# Altium PCB Buck Converter Rev1.PcbDoc (part 1 of 2)
Units mil, origin at the board's own origin, x right, y up, seen from the top; angles counter-clockwise.
Board outline 6000 x 4000 mil, 10 copper layers (Top Layer, Int1 (GND), Int2 (PWR), Int3 (Sign), Int4 (GND, Int5 (GND), Int6 (Sign), Int7 (PWR), Int8 (GND), Bottom Layer), stack 61.78 mil thick; 38 components, 749 nets, 114 pads, 81 vias.
Unrouted connection lines stored in the file: 9.
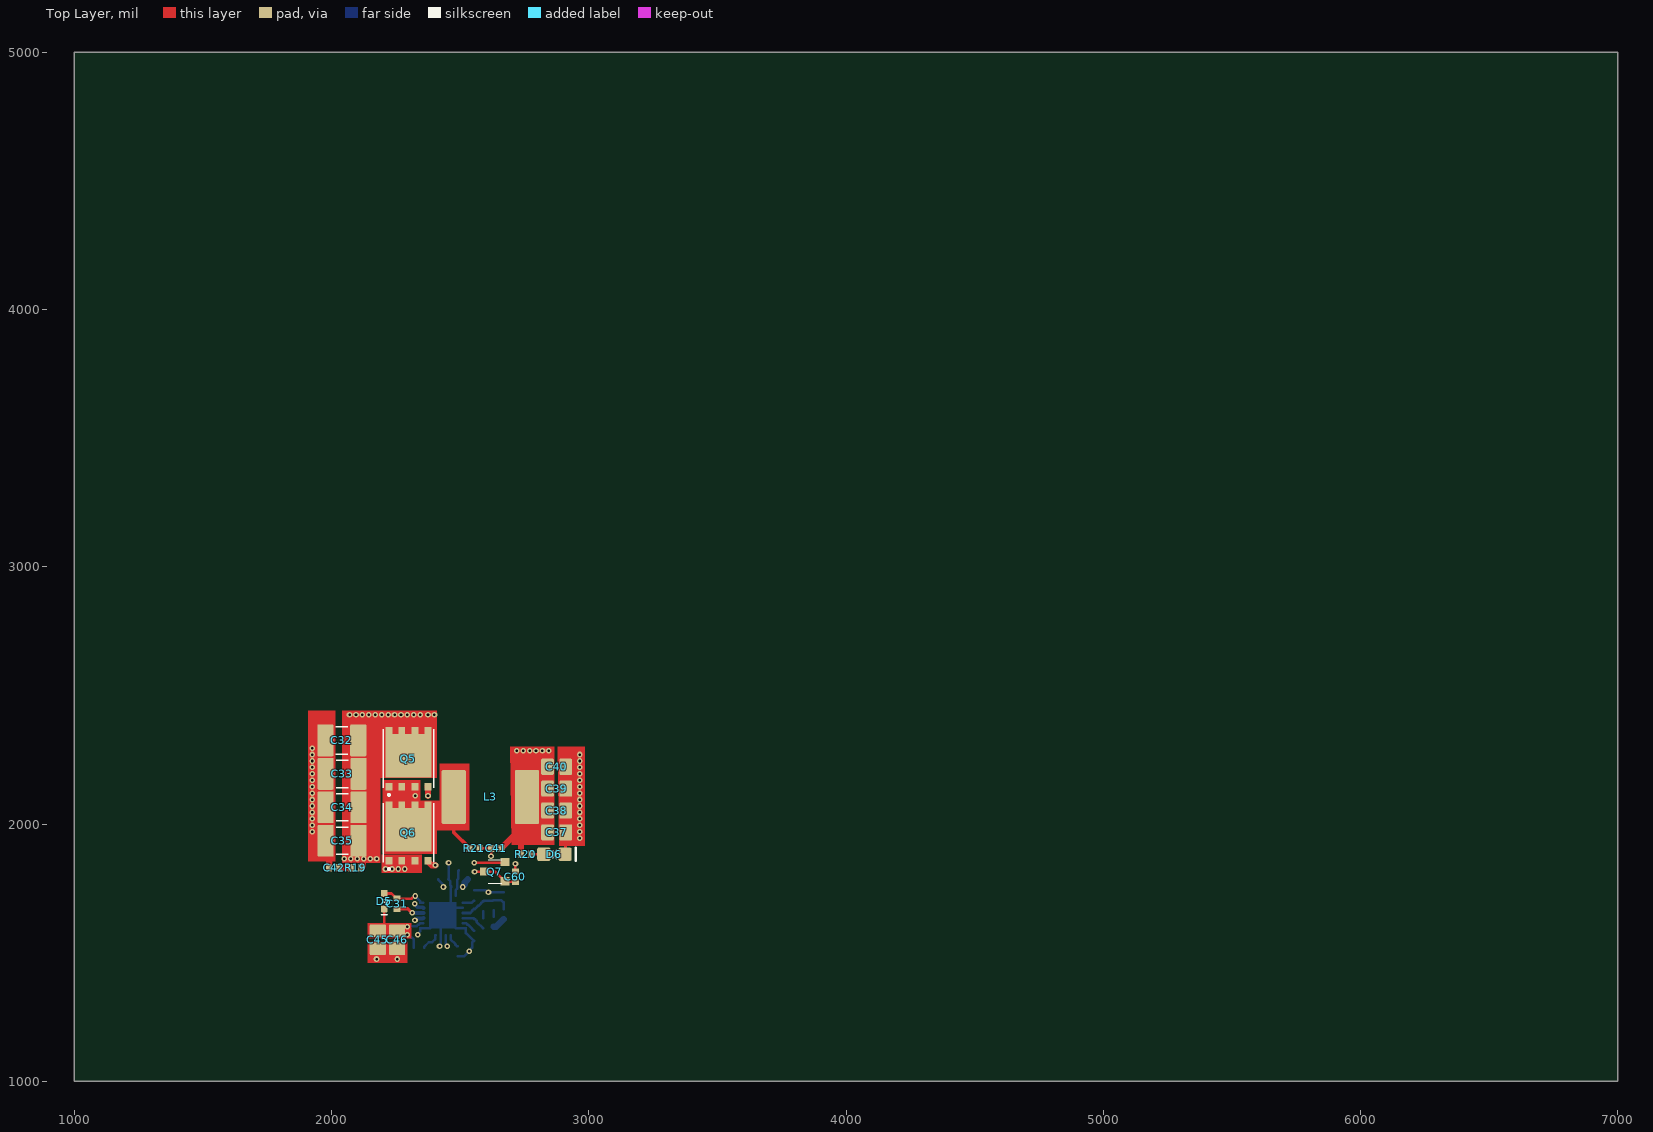
[diagram p0: Top Layer view]
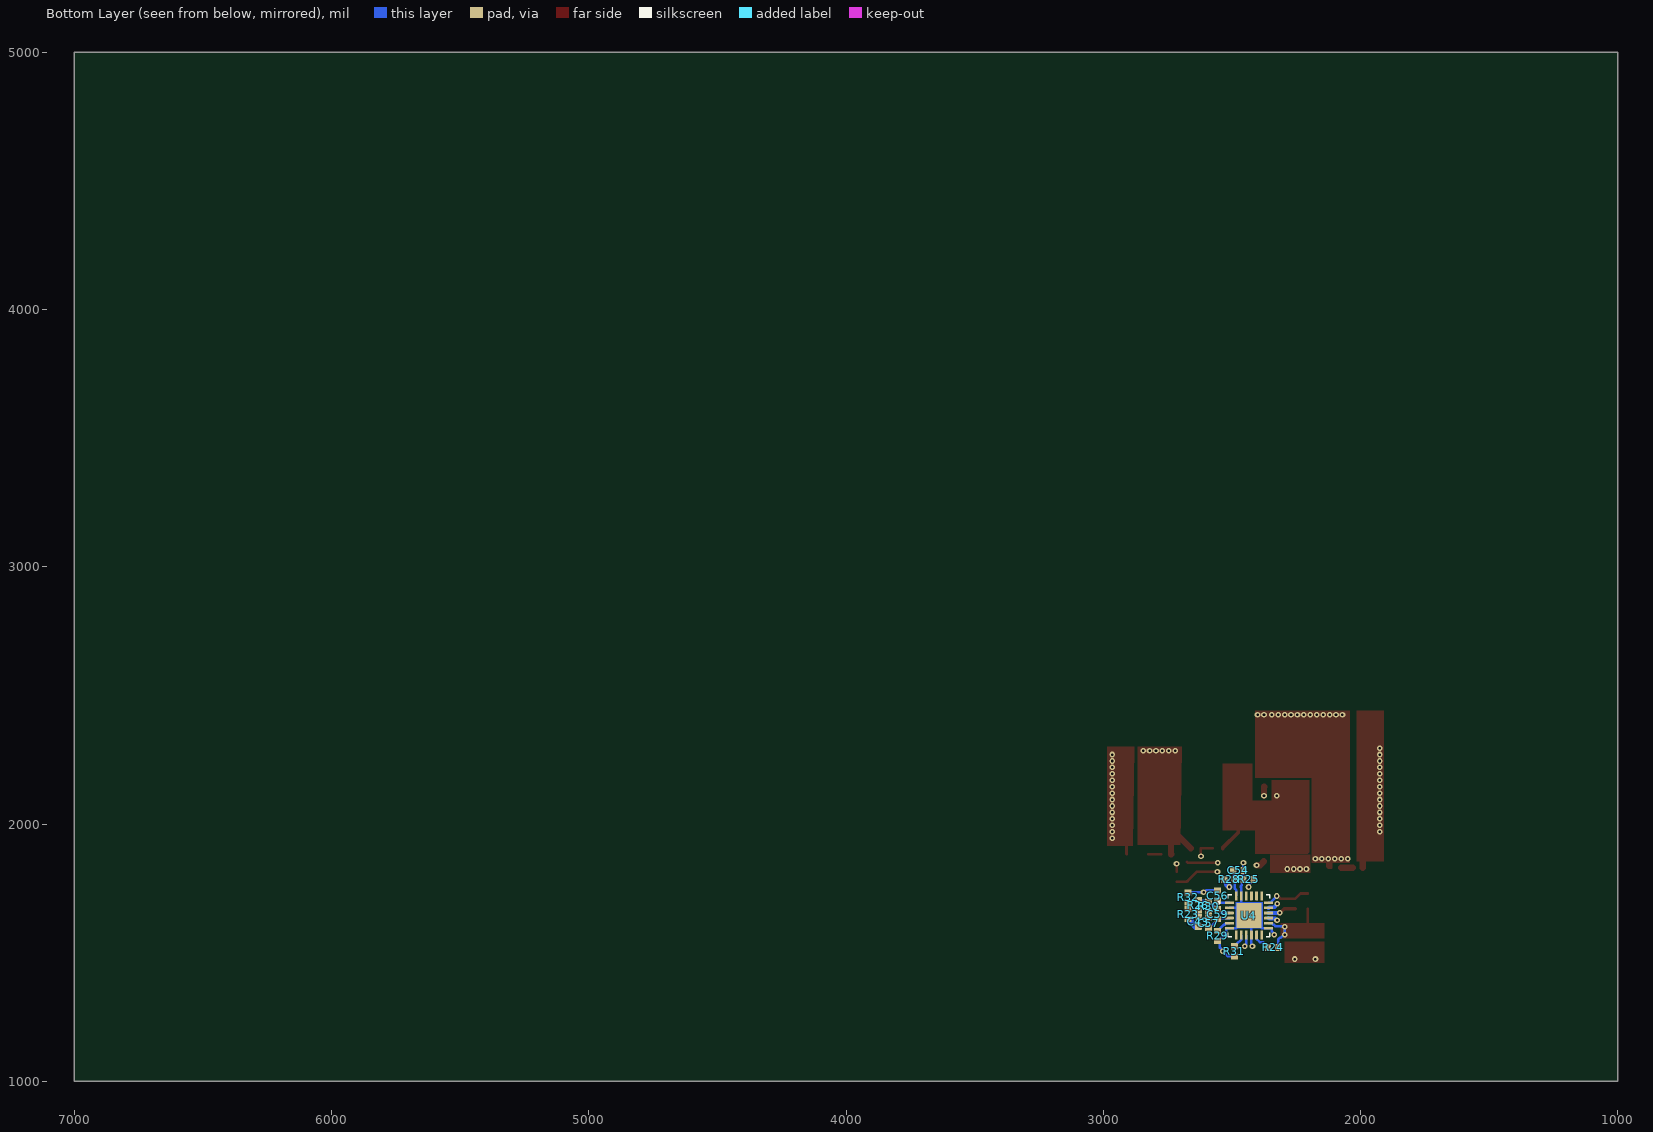
[diagram p1: Bottom Layer view, seen from below]
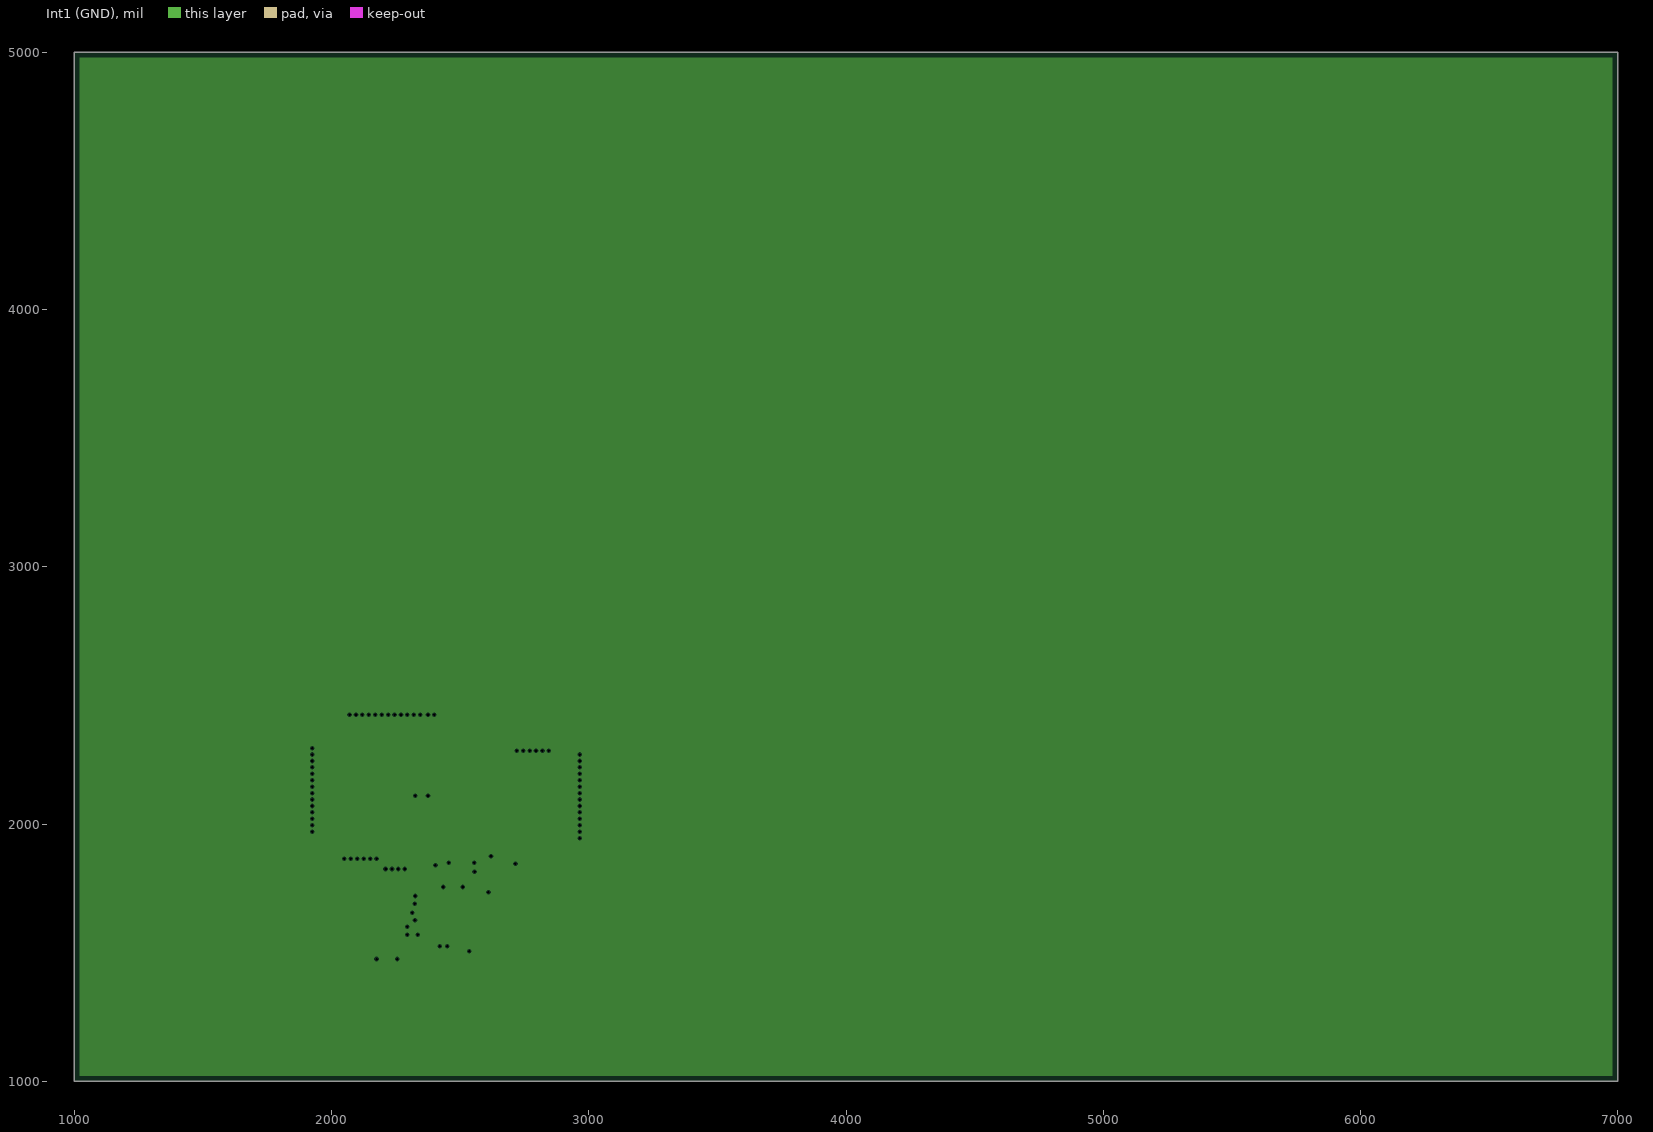
[diagram p2: Int1 (GND), clearances drawn from the general rule]
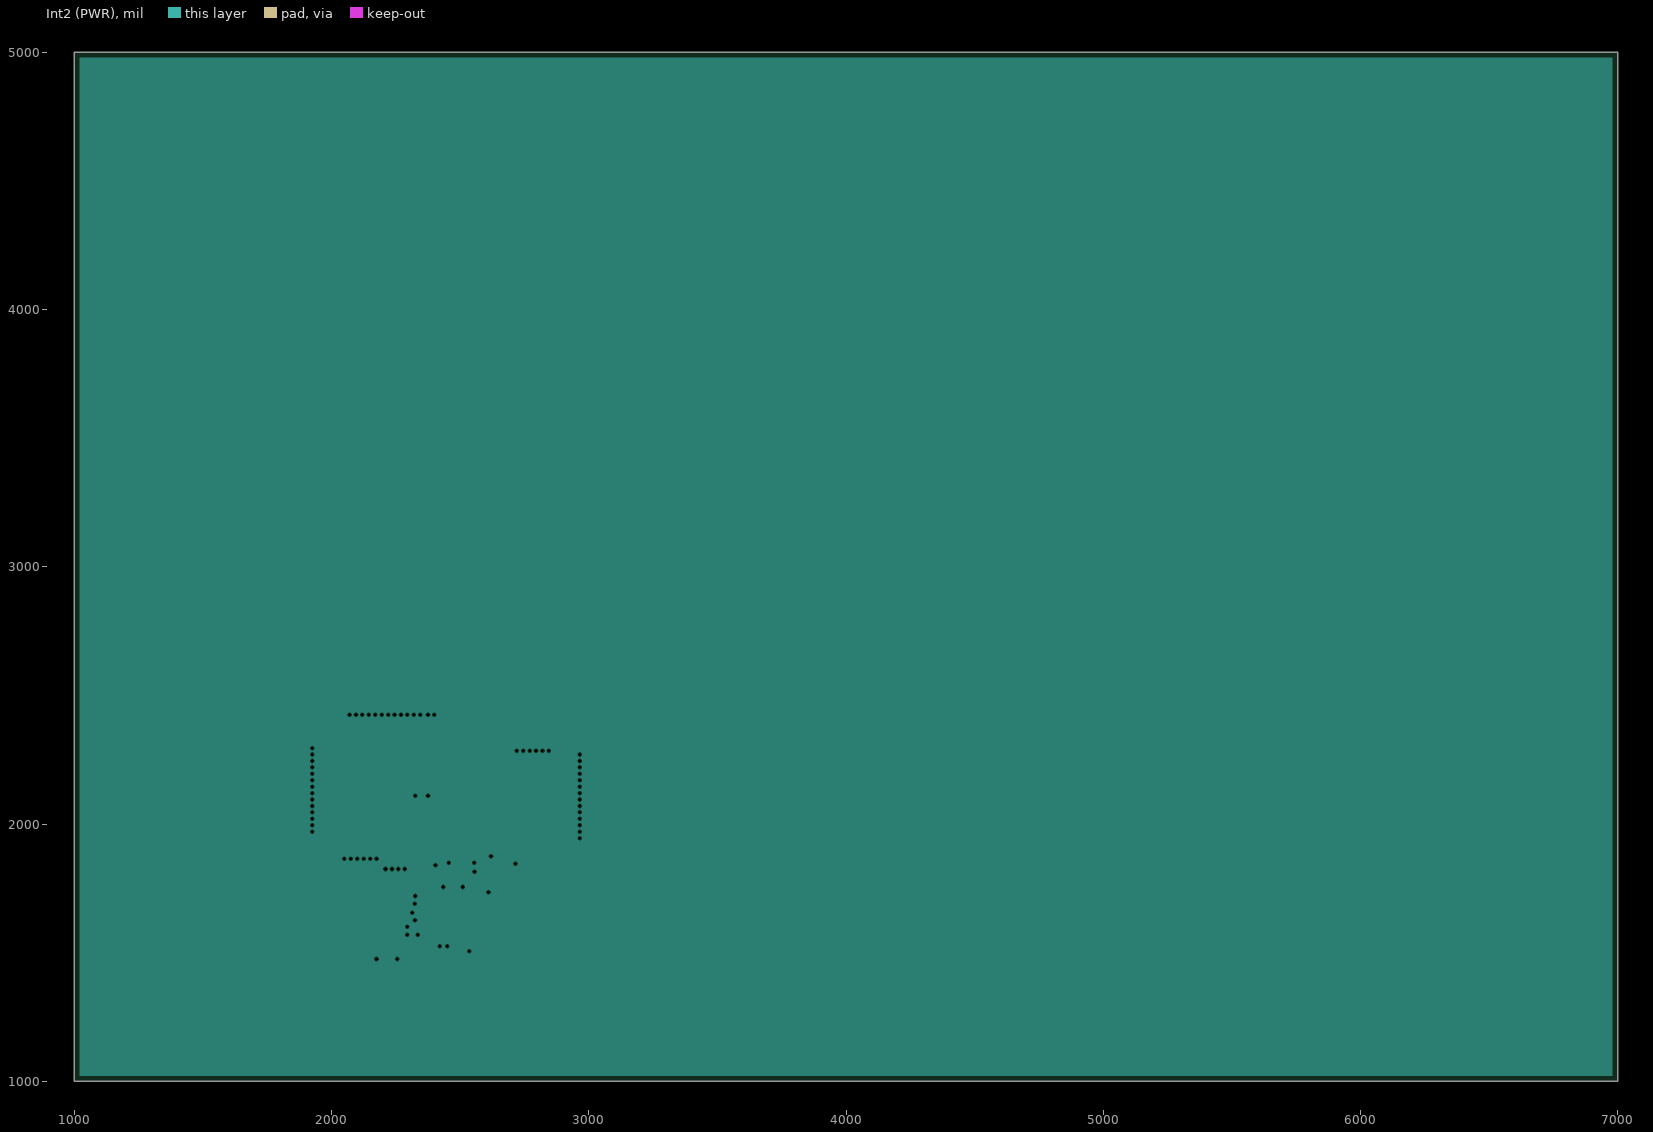
[diagram p3: Int2 (PWR), clearances drawn from the general rule]
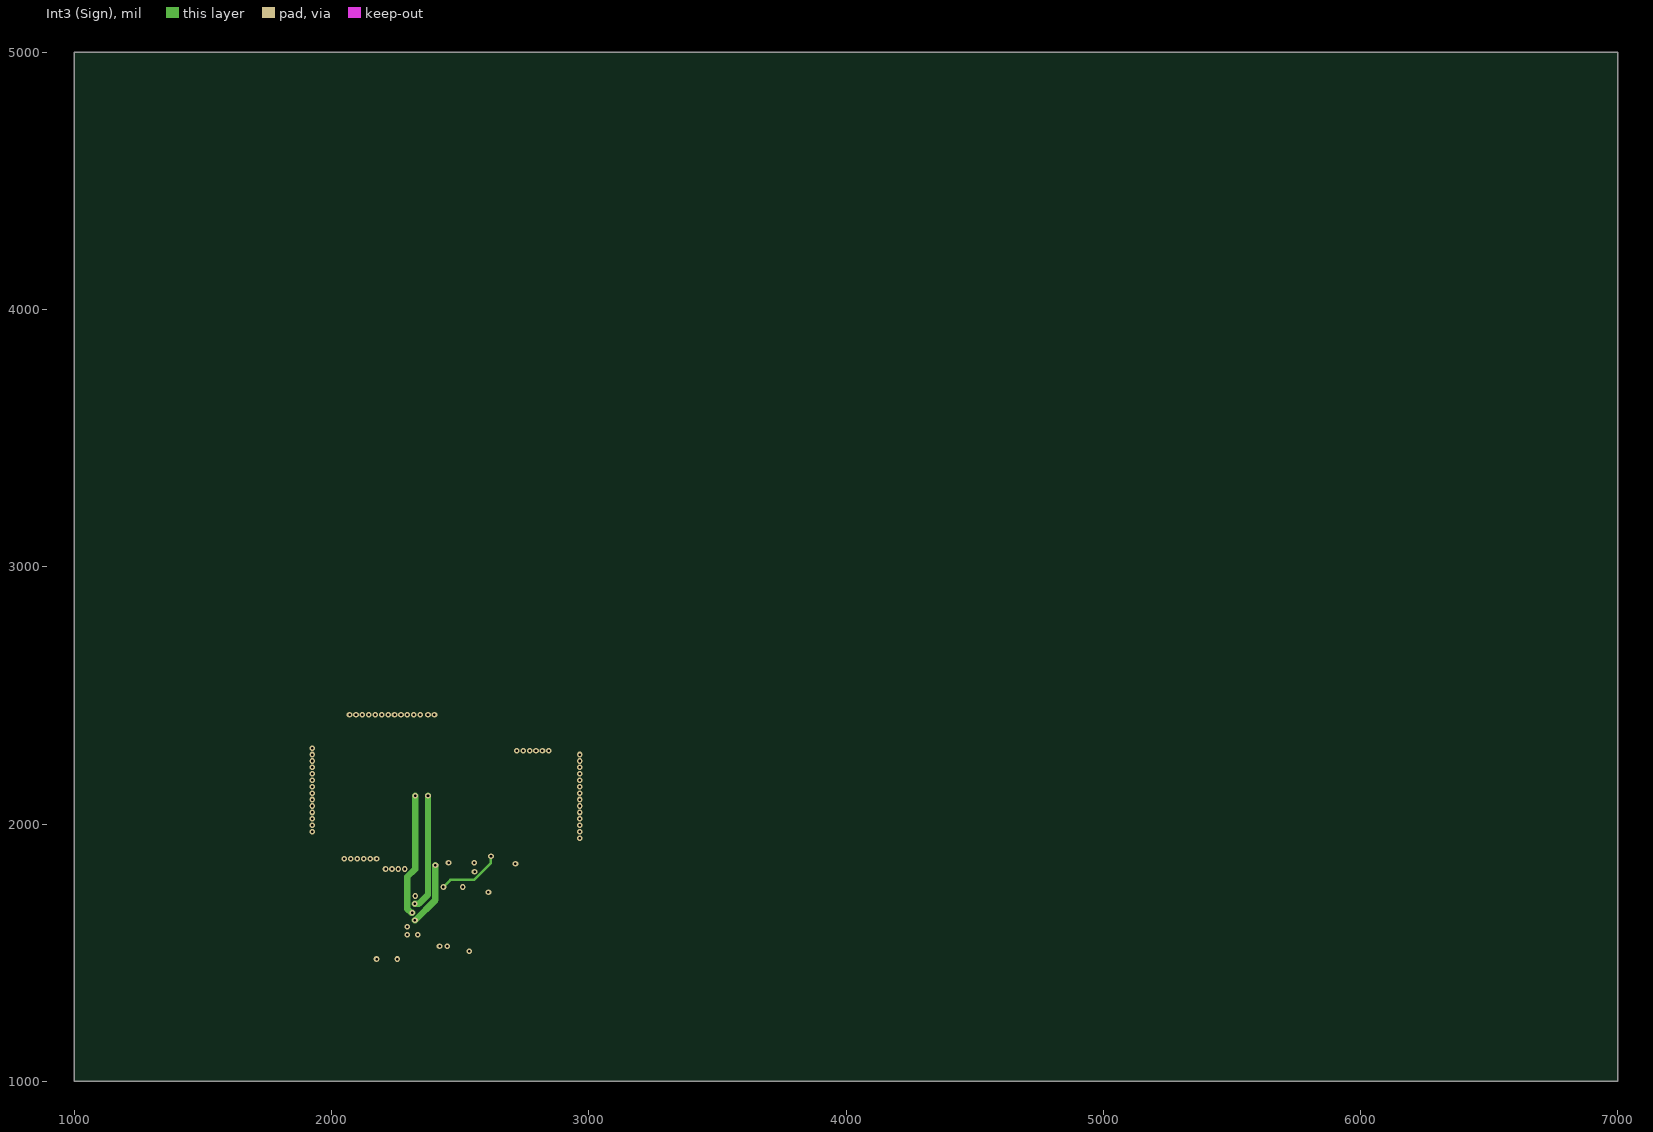
[diagram p4: Int3 (Sign)]
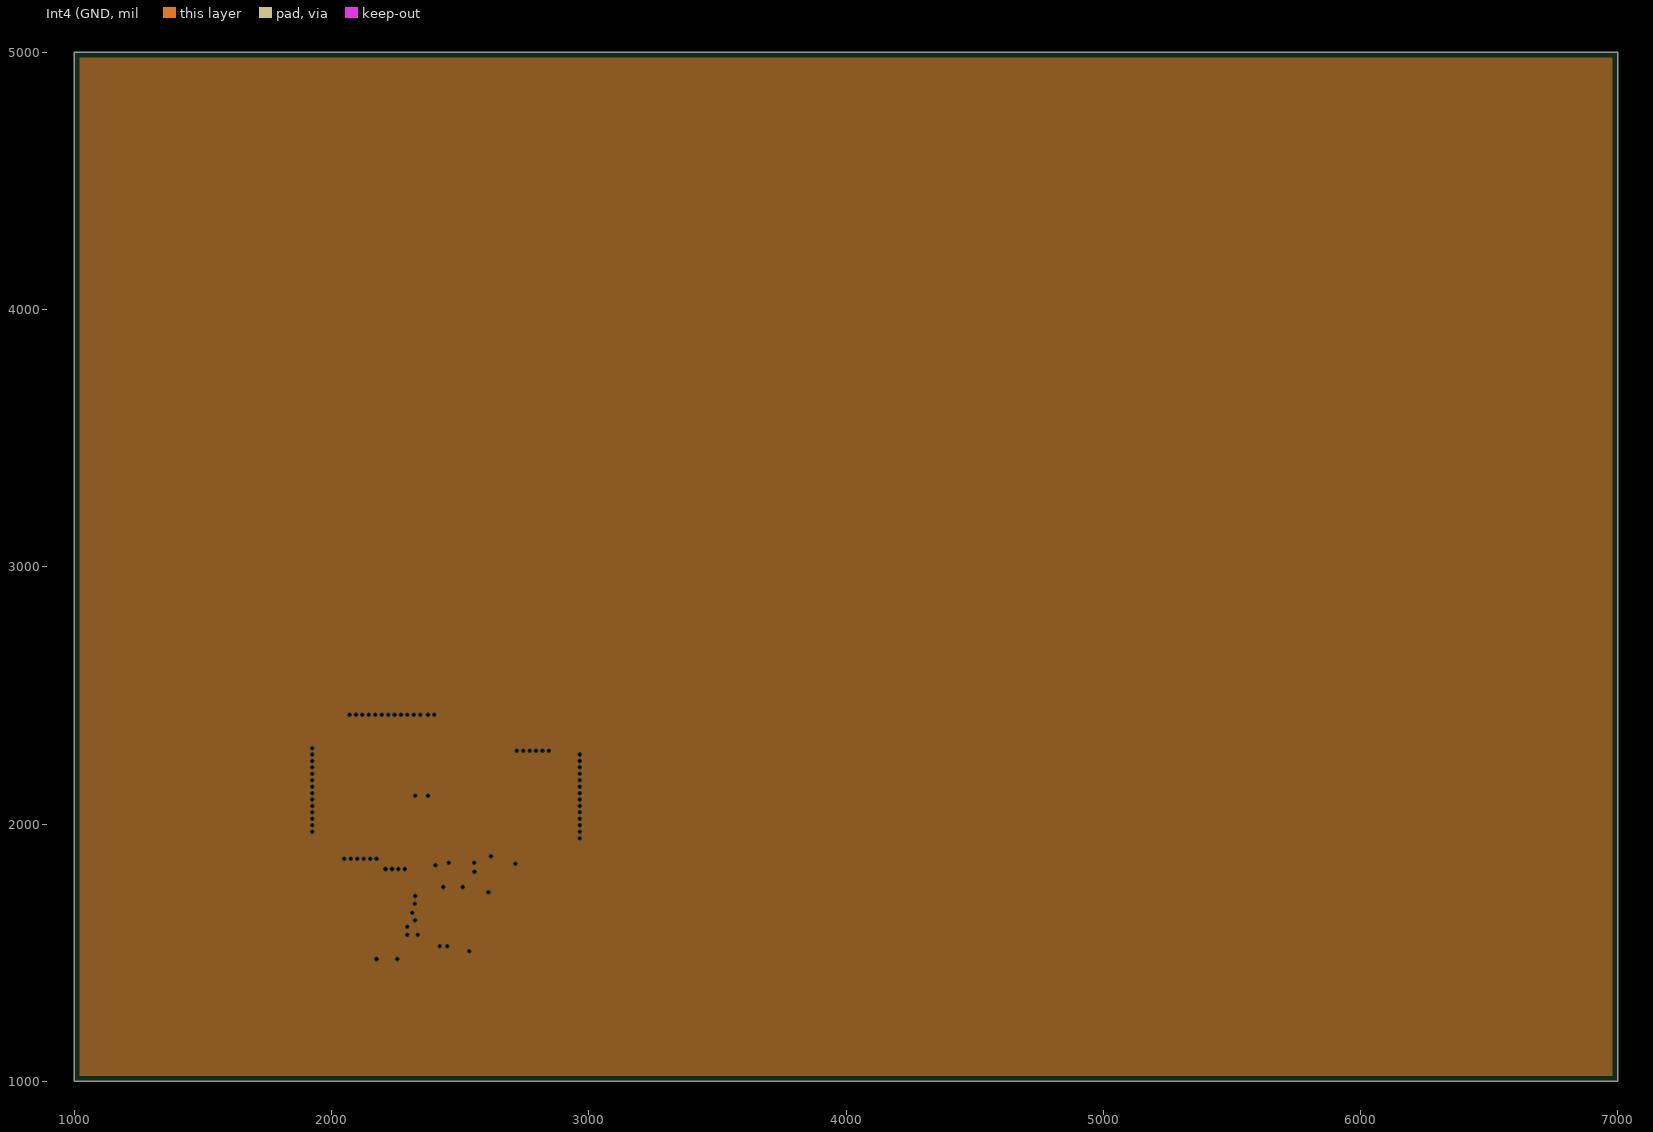
[diagram p5: Int4 (GND, clearances drawn from the general rule]
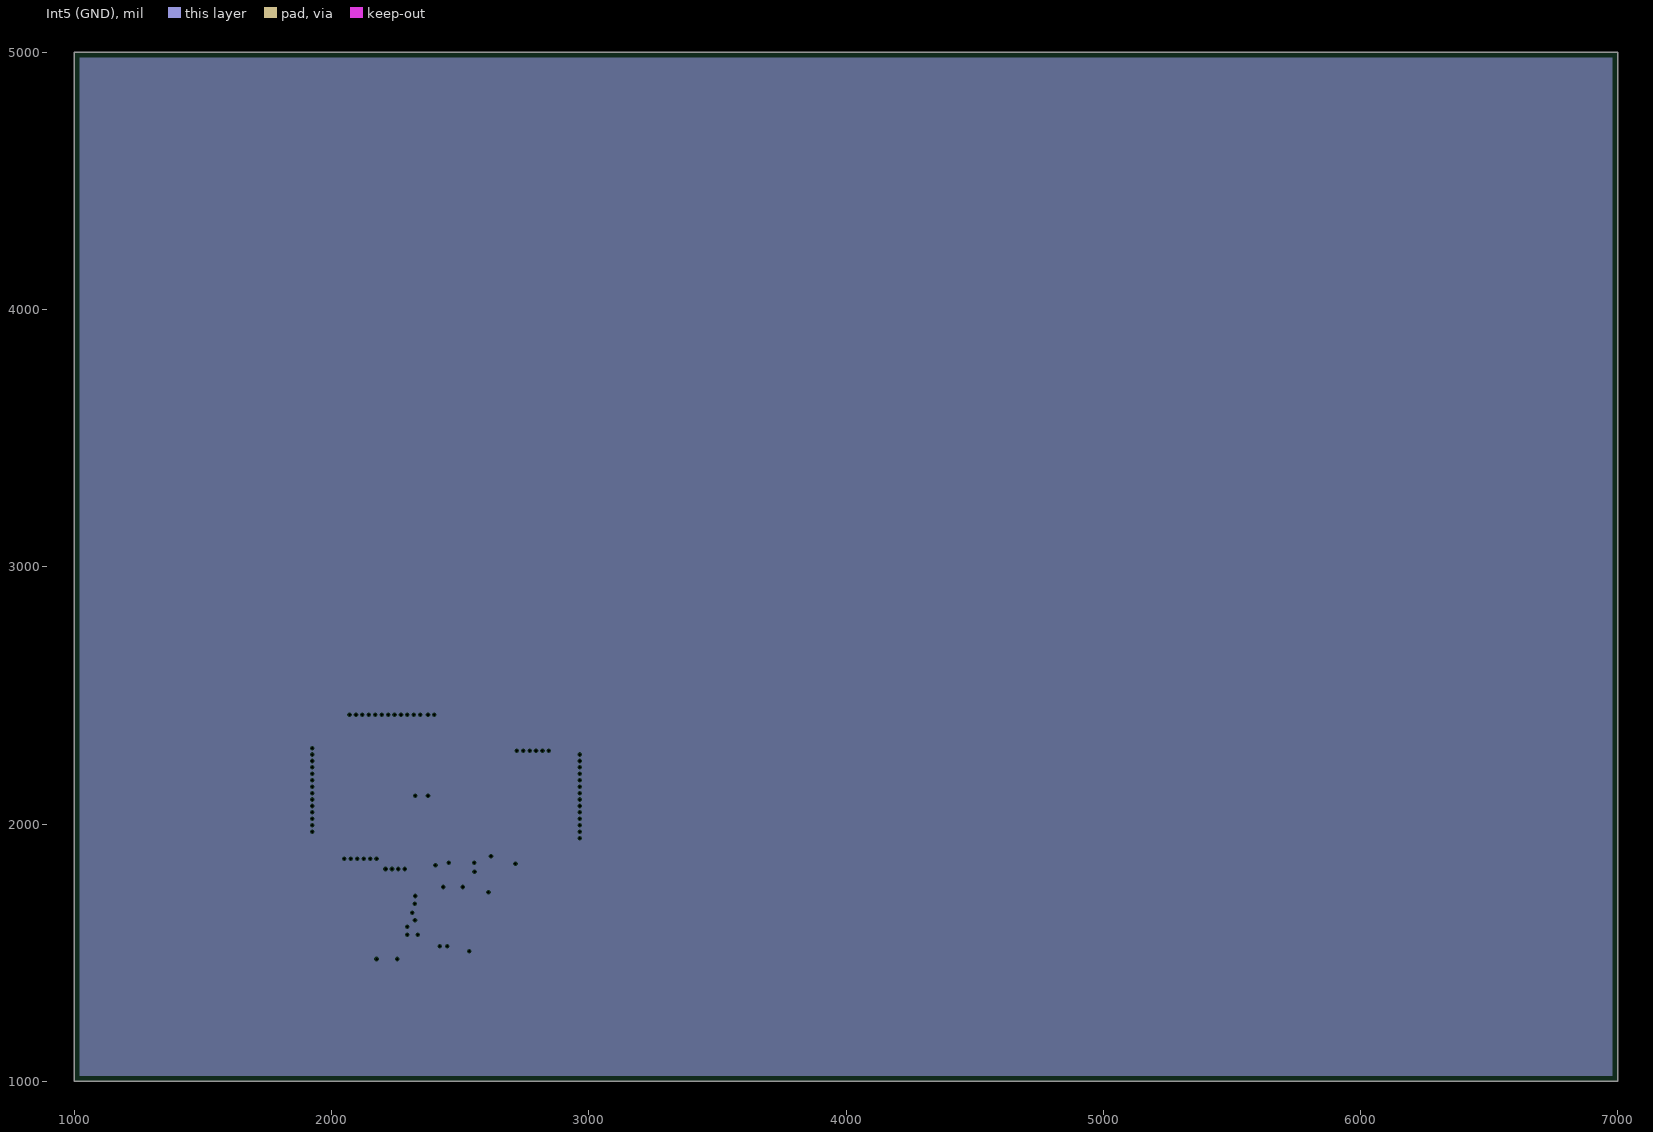
[diagram p6: Int5 (GND), clearances drawn from the general rule]
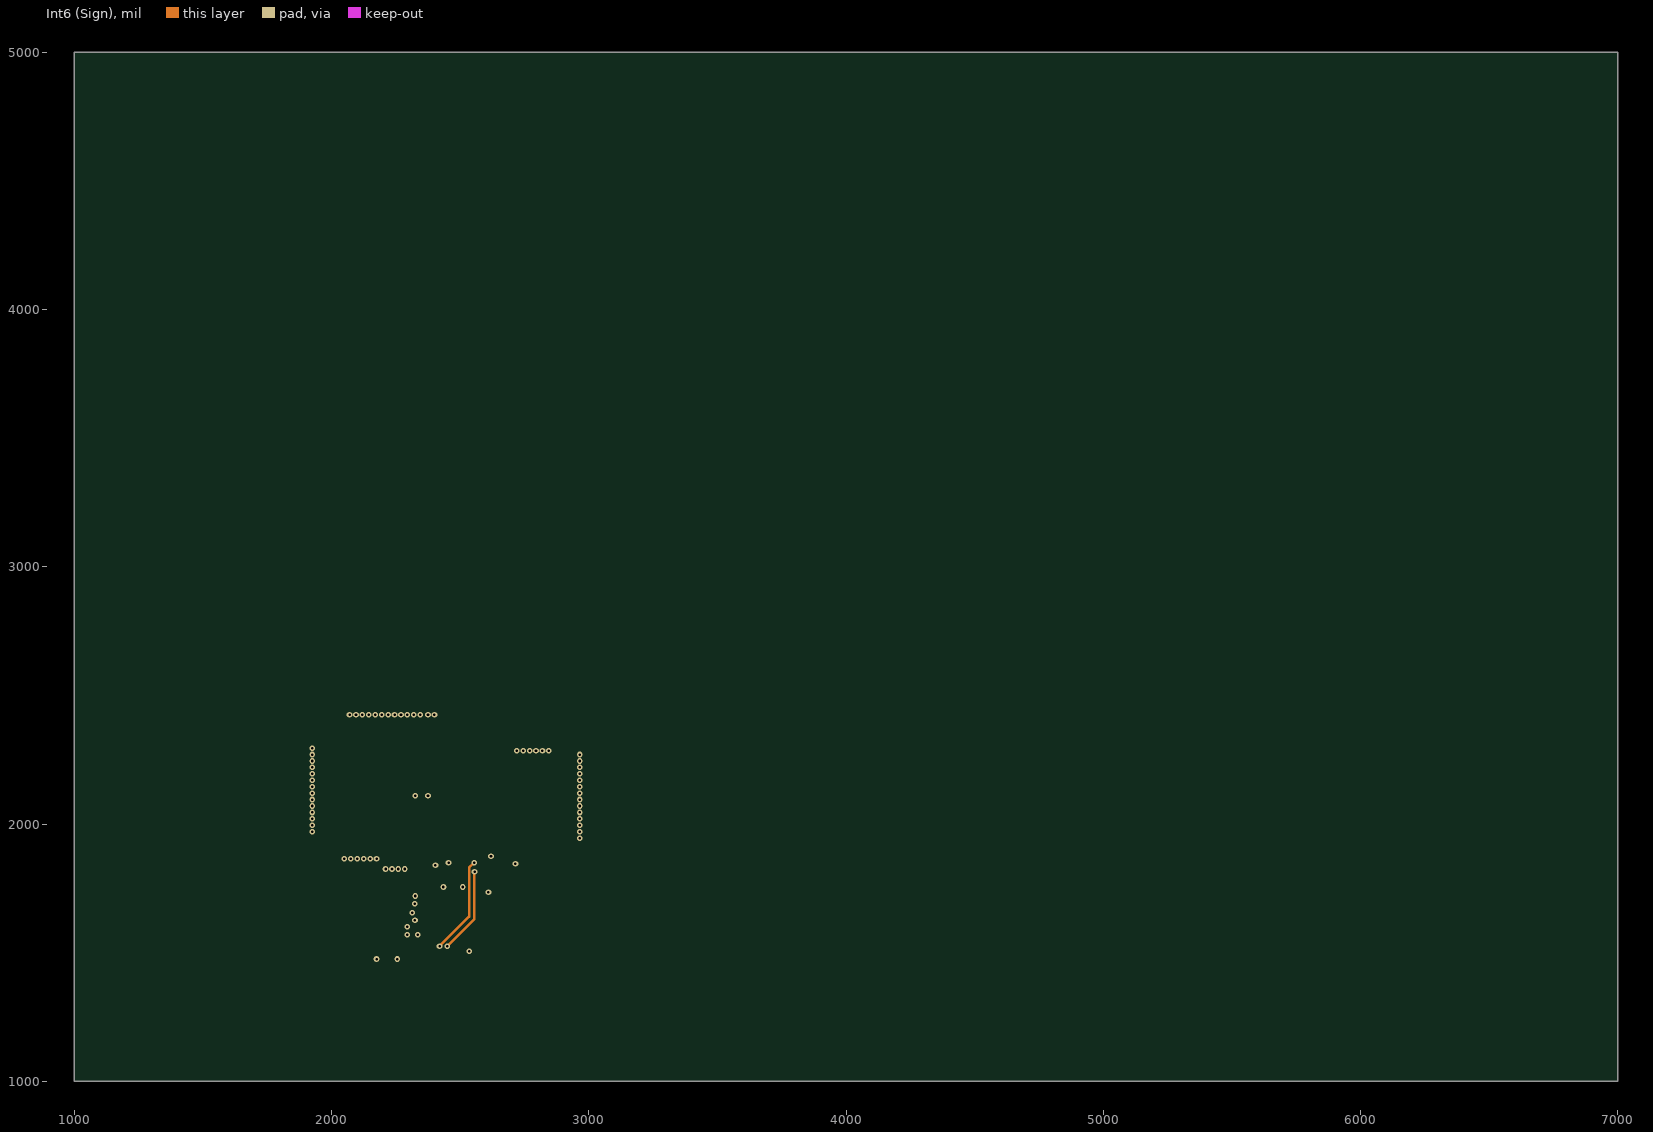
[diagram p7: Int6 (Sign)]
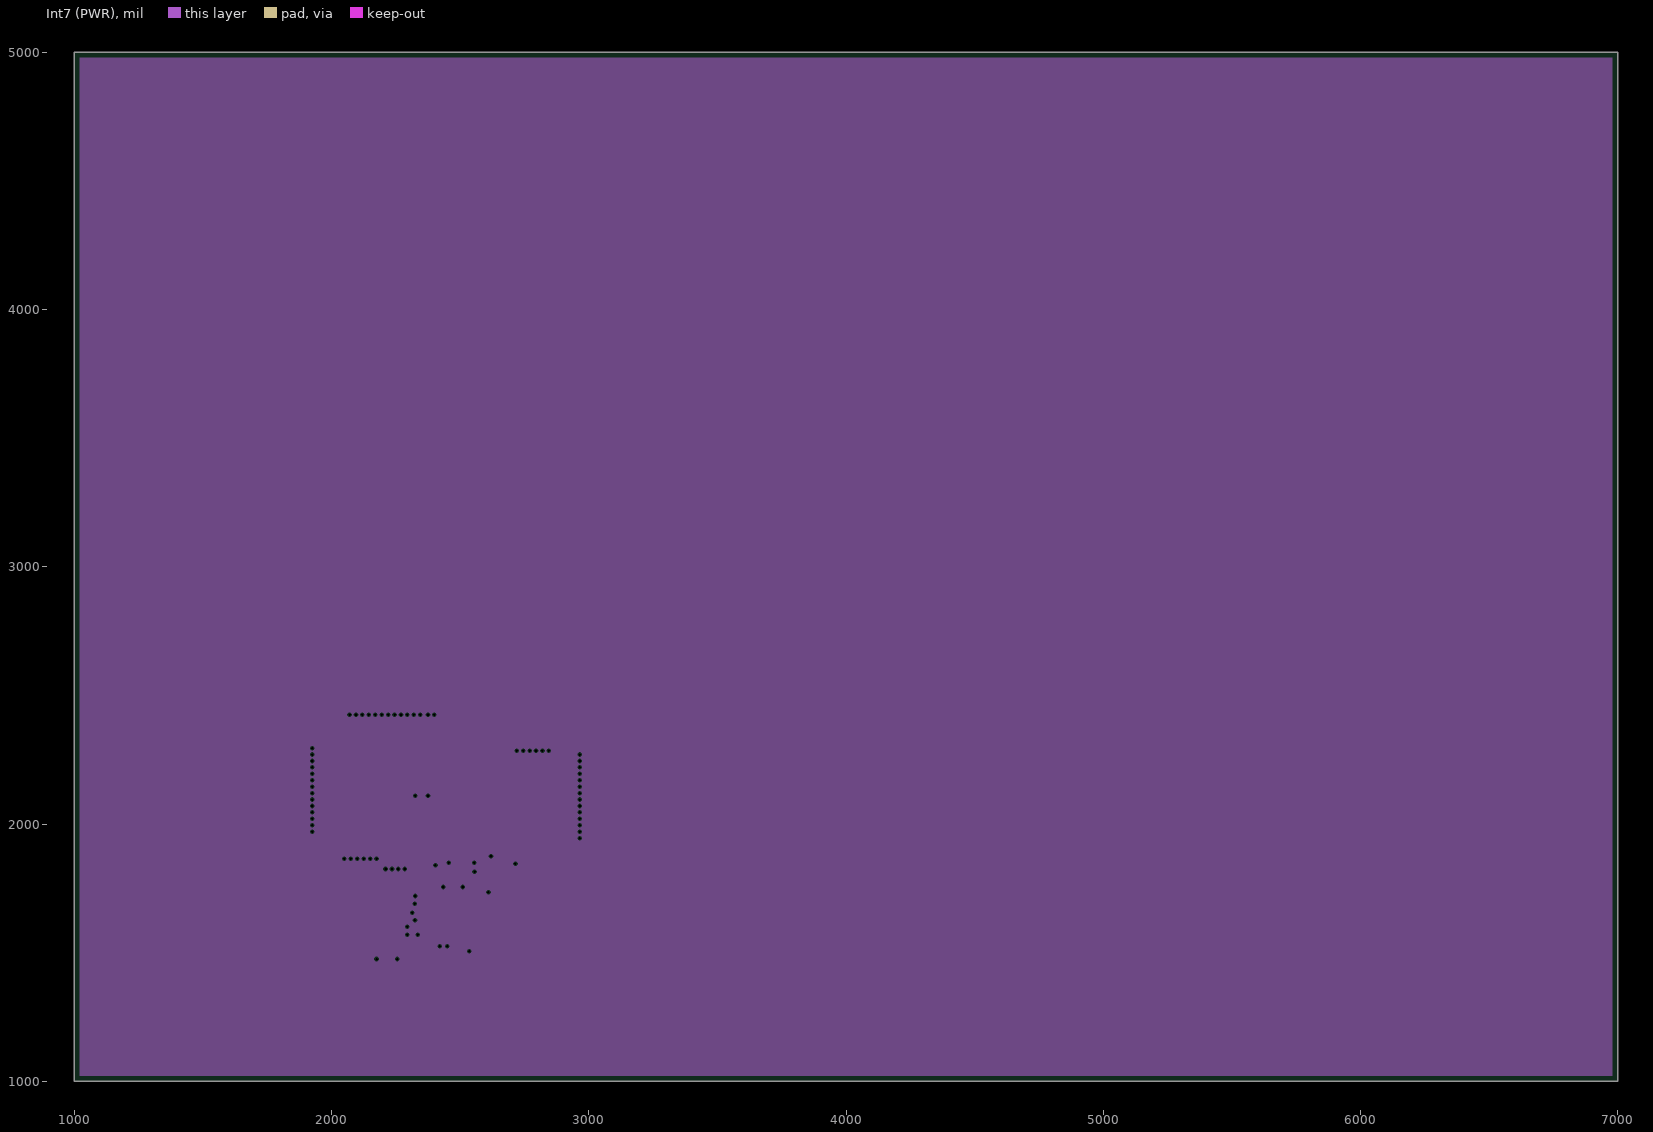
[diagram p8: Int7 (PWR), clearances drawn from the general rule]
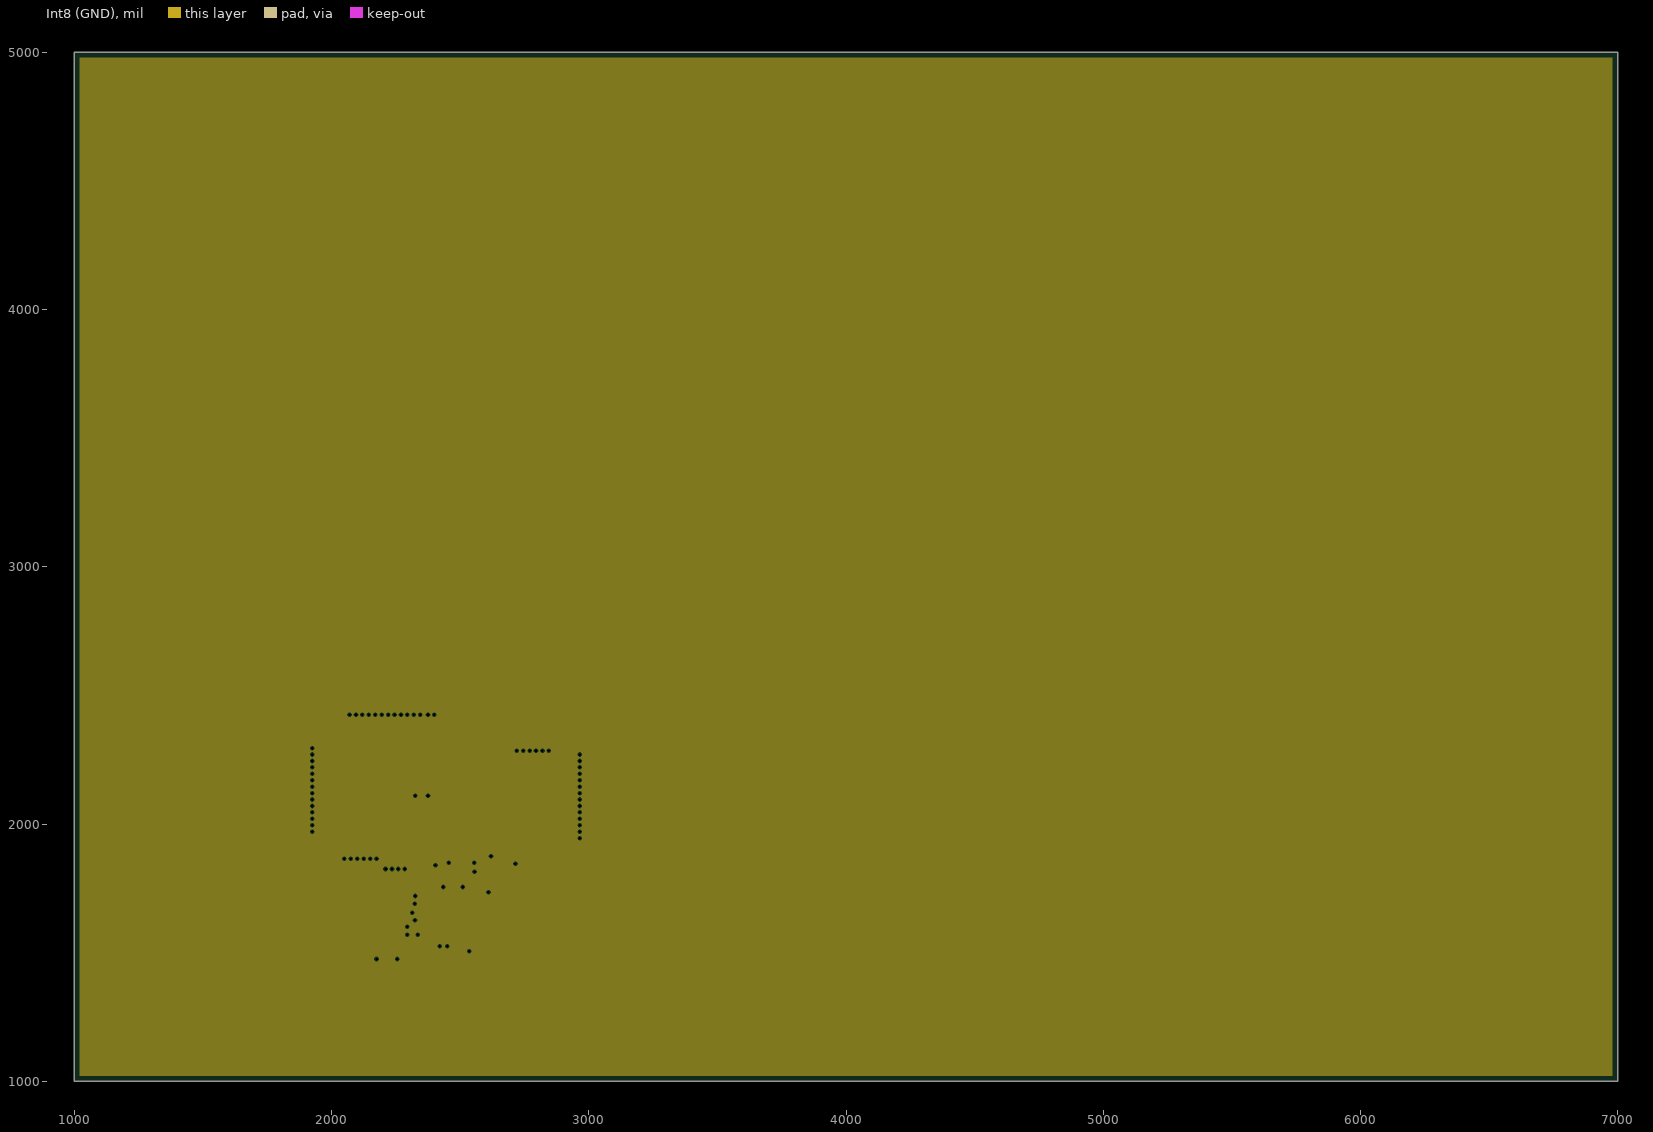
[diagram p9: Int8 (GND), clearances drawn from the general rule]
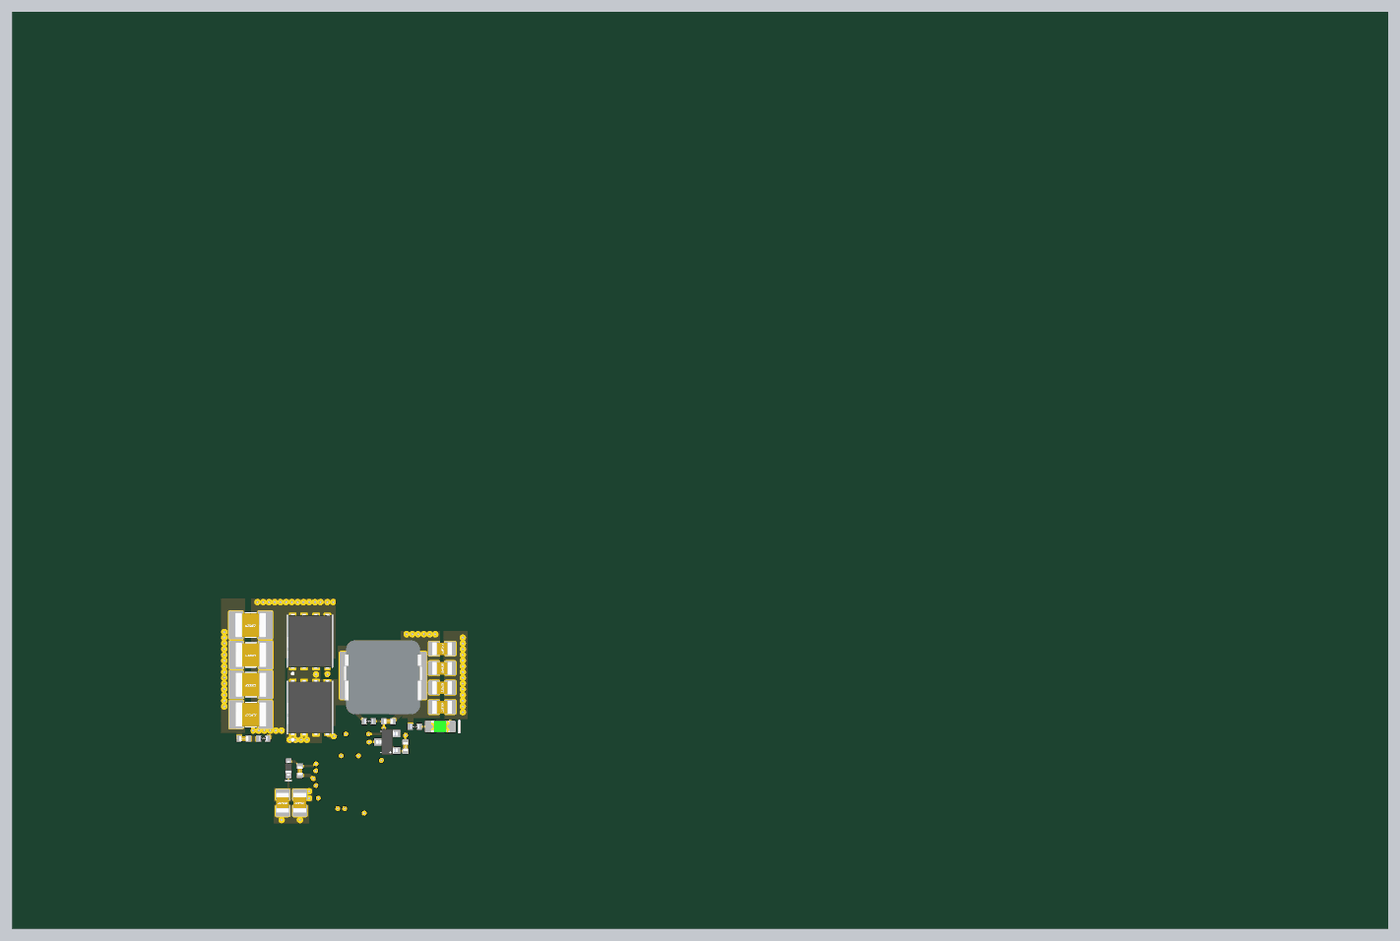
[diagram p11: 3D render of the assembled board from above, using the file's embedded part models]
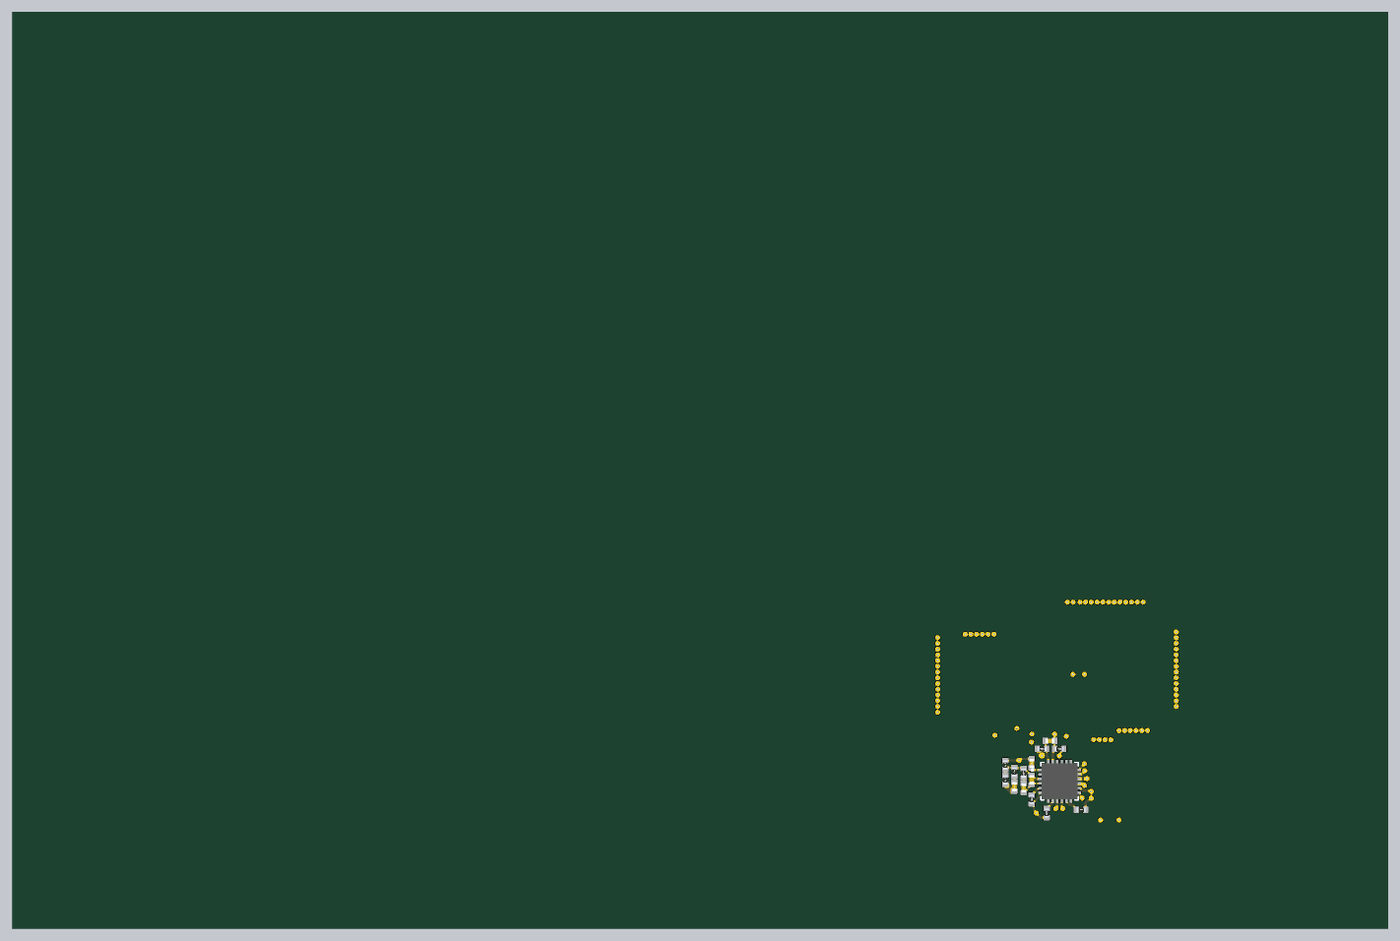
[diagram p12: 3D render of the assembled board from below, using the file's embedded part models]

## Layer stack, top to bottom
Top Solder: solder mask 1, SM-001, Dk 4
Top Layer: signal copper 1.378
Dielectric 1: prepreg 2.8, PP-006, Dk 4.1
Dielectric 2: prepreg 2.8, PP-006, Dk 4.1
Int1 (GND): plane copper 1.378
Dielectric 3: core 5, Core-016, Dk 4.3
Int2 (PWR): plane copper 1.378
Dielectric 4: prepreg 2.8, PP-006, Dk 4.1
Dielectric 5: prepreg 2.8, PP-006, Dk 4.1
Int3 (Sign): signal copper 1.378
Dielectric 6: core 5, Core-016, Dk 4.3
Int4 (GND: plane copper 1.378
Dielectric 7: prepreg 2.8, PP-006, Dk 4.1
Dielectric 8: prepreg 2.8, PP-006, Dk 4.1
Int5 (GND): plane copper 1.378
Dielectric 9: core 5, Core-016, Dk 4.3
Int6 (Sign): signal copper 1.378
Dielectric 10: prepreg 2.8, PP-006, Dk 4.1
Dielectric 11: prepreg 2.8, PP-006, Dk 4.1
Int7 (PWR): plane copper 1.378
Dielectric 12: core 5, Core-016, Dk 4.3
Int8 (GND): plane copper 1.378
Dielectric 13: prepreg 2.8, PP-006, Dk 4.1
Dielectric 14: prepreg 2.8, PP-006, Dk 4.1
Bottom Layer: signal copper 1.378
Bottom Solder: solder mask 1, SM-001, Dk 4

## Board outline
1000,1000 7000,1000 7000,5000 1000,5000

## Design rules (kind name [scope] priority, off if disabled: settings)
BoardOutlineClearance [All] p1: gap=7.87 ignorepadtopadclearanceinfootprint=FALSE
Clearance [All] p1: gap=4 ignorepadtopadclearanceinfootprint=FALSE except(5: Arc-Via Track-Via SMDPad-Via THPad-Via Via-Via Via-Fill Via-Poly Via-Region Via-Text; 9.84: Arc-Hole Track-Hole SMDPad-Hole THPad-Hole Via-Hole Fill-Hole Poly-Hole Region-Hole Text-Hole)
ComponentClearance [All] p1: gap=4 collisioncheckmode=3 verticalgap=4 showdistances=TRUE
DiffPairsRouting [All] p1: maxlimit=4 minlimit=4 mostfreqgap=4 toplayer_minwidth=4 toplayer_maxwidth=71497.94 toplayer_prefwidth=4 midlayer2_minwidth=4 midlayer2_maxwidth=71497.94 midlayer2_prefwidth=4 midlayer3_minwidth=4 midlayer3_maxwidth=71497.94 midlayer3_prefwidth=4 bottomlayer_minwidth=4 bottomlayer_maxwidth=71497.94 bottomlayer_prefwidth=4 maxuncoupledlength=500
Height [All] p1: minheight=0 maxheight=71497.94 prefheight=500
HoleSize [All] p1: absolutevalues=TRUE maxlimit=248.03 minlimit=7.87 maxpercent=80.000 minpercent=20.000
HoleToHoleClearance [All] p1: gap=9.84 allowstackedmicrovias=FALSE
MinimumAnnularRing [All] p1: minimumring=3
MinimumSolderMaskSliver [All] p1: minsoldermaskwidth=0
PlaneClearance [All] p1: clearance=4
PlaneConnect PlaneConnectPowerPads [InPadClass('PowerPads')] p1: planeconnectstyle=Direct reliefexpansion=20 reliefentries=4 reliefconductorwidth=10 reliefairgap=10
PlaneConnect [All] p2: pad.planeconnectstyle=Relief pad.reliefexpansion=11.81 pad.reliefentries=4 pad.reliefconductorwidth=4 pad.reliefairgap=4 via.planeconnectstyle=Direct via.reliefexpansion=11.81 via.reliefentries=4 via.reliefconductorwidth=5 via.reliefairgap=5
PolygonConnect PolygonConnectPowerPads [All vs (InPadClass('PowerPads'))] p1: connectstyle=Direct reliefconductorwidth=10 reliefentries=4 polygonreliefangle="90 Angle" airgapwidth=10
PolygonConnect [All] p2: thpad.connectstyle=Relief thpad.reliefconductorwidth=4 thpad.reliefentries=4 thpad.polygonreliefangle="90 Angle" thpad.airgapwidth=4 smdpad.connectstyle=Relief smdpad.reliefconductorwidth=4 smdpad.reliefentries=4 smdpad.polygonreliefangle="90 Angle" smdpad.airgapwidth=4 via.connectstyle=Direct via.reliefconductorwidth=5 via.reliefentries=4 via.polygonreliefangle="90 Angle" via.airgapwidth=5
RoutingVias [All] p1: holewidth=7.87 width=17.72 viastyle="Through Hole" minholewidth=7.87 minwidth=17.72 maxholewidth=248.03 maxwidth=257.87
SilkToSilkClearance [All] p1: silktosilkclearance=0
SilkToSolderMaskClearance [IsPad] p1: minsilkscreentomaskgap=4 clearancetoexposedcopper=TRUE
SolderMaskExpansion [All] p1: expansion=2.95 istentingtop=FALSE
Width [All] p1: maxlimit=71497.94 minlimit=4 preferedwidth=4
20 further rules are at their usual default settings.

## Classes and differential pairs
differential pair class USB: NV_USB0.DATA NV_USB1.DATA NV_USB2.DATA NV_USB3.DATA
differential pair class UPHY: NV_UPHY0.RX NV_UPHY0.TX NV_UPHY0_TX NV_UPHY1.RX NV_UPHY1.TX NV_UPHY1_TX NV_UPHY2.RX NV_UPHY2.TX NV_UPHY2_TX NV_UPHY3.RX NV_UPHY3.TX NV_UPHY3_TX NV_UPHY4.RX NV_UPHY4.TX NV_UPHY4_TX NV_UPHY5.RX NV_UPHY5.TX NV_UPHY5_TX NV_UPHY6.RX NV_UPHY6.TX NV_UPHY6_TX NV_UPHY7.RX NV_UPHY7.TX NV_UPHY7_TX NV_UPHY8.RX NV_UPHY8.TX NV_UPHY8_TX NV_UPHY9.RX NV_UPHY9.TX NV_UPHY9_TX NV_UPHY10.RX NV_UPHY10.TX NV_UPHY10_TX NV_UPHY11.RX NV_UPHY11.TX NV_UPHY11_TX
differential pair class UPHY_CLK: NV_UPHY_CLK1.REFCLK NV_UPHY_CLK2.REFCLK
differential pair class UPHY_CLK2: NV_UPHY_CLK2.REFCLK
differential pair class UPHY_CLK1: NV_UPHY_CLK1.REFCLK
differential pair class UPHY11: NV_UPHY11.RX NV_UPHY11.TX NV_UPHY11_TX
differential pair class UPHY10: NV_UPHY10.RX NV_UPHY10.TX NV_UPHY10_TX
differential pair class UPHY9: NV_UPHY9.RX NV_UPHY9.TX NV_UPHY9_TX
differential pair class UPHY8: NV_UPHY8.RX NV_UPHY8.TX NV_UPHY8_TX
differential pair class UPHY7: NV_UPHY7.RX NV_UPHY7.TX NV_UPHY7_TX
differential pair class UPHY6: NV_UPHY6.RX NV_UPHY6.TX NV_UPHY6_TX
differential pair class UPHY5: NV_UPHY5.RX NV_UPHY5.TX NV_UPHY5_TX
differential pair class UPHY4: NV_UPHY4.RX NV_UPHY4.TX NV_UPHY4_TX
differential pair class UPHY3: NV_UPHY3.RX NV_UPHY3.TX NV_UPHY3_TX
differential pair class UPHY2: NV_UPHY2.RX NV_UPHY2.TX NV_UPHY2_TX
differential pair class UPHY1: NV_UPHY1.RX NV_UPHY1.TX NV_UPHY1_TX
differential pair class UPHY0: NV_UPHY0.RX NV_UPHY0.TX NV_UPHY0_TX
differential pair class PCIE: NV_PCIE_CTRL0.CLK NV_PCIE_CTRL1.CLK NV_PCIE_CTRL2.CLK NV_PCIE_CTRL3.CLK NV_PCIE_CTRL4.CLK NV_PCIE_CTRL5.CLK
differential pair class PCIE_CLK: NV_PCIE_CTRL0.CLK NV_PCIE_CTRL1.CLK NV_PCIE_CTRL2.CLK NV_PCIE_CTRL3.CLK NV_PCIE_CTRL4.CLK NV_PCIE_CTRL5.CLK
differential pair class PCIE_CLK5: NV_PCIE_CTRL5.CLK
differential pair class PCIE_CLK4: NV_PCIE_CTRL4.CLK
differential pair class PCIE_CLK3: NV_PCIE_CTRL3.CLK
differential pair class PCIE_CLK2: NV_PCIE_CTRL2.CLK
differential pair class PCIE_CLK1: NV_PCIE_CTRL1.CLK
differential pair class PCIE_CLK0: NV_PCIE_CTRL0.CLK
differential pair class NVHS: NV0HS0.RX NV0HS0.TX NV0HS0_TX NV0HS1.RX NV0HS1.TX NV0HS1_TX NV0HS2.RX NV0HS2.TX NV0HS2_TX NV0HS3.RX NV0HS3.TX NV0HS3_TX NV0HS4.RX NV0HS4.TX NV0HS4_TX NV0HS5.RX NV0HS5.TX NV0HS5_TX NV0HS6.RX NV0HS6.TX NV0HS6_TX NV0HS7.RX NV0HS7.TX NV0HS7_TX NV0HS_CLK0.REFCLK NV0HS_CLK1.REFCLK NV1HS0.RX NV1HS0.TX NV1HS0_TX NV1HS1.RX NV1HS1.TX NV1HS1_TX NV1HS2.RX NV1HS2.TX NV1HS2_TX NV1HS3.RX NV1HS3.TX NV1HS3_TX NV1HS4.RX NV1HS4.TX NV1HS4_TX NV1HS5.RX NV1HS5.TX NV1HS5_TX NV1HS6.RX NV1HS6.TX NV1HS6_TX NV1HS7.RX NV1HS7.TX NV1HS7_TX NV1HS_CLK0.REFCLK NV1HS_CLK1.REFCLK
differential pair class NVHS_CLK: NV0HS_CLK0.REFCLK NV0HS_CLK1.REFCLK NV1HS_CLK0.REFCLK NV1HS_CLK1.REFCLK
differential pair class NV_USB: NV_USB0.DATA NV_USB1.DATA NV_USB2.DATA NV_USB3.DATA
differential pair class NV_USB3: NV_USB3.DATA
differential pair class NV_USB2: NV_USB2.DATA
differential pair class NV_USB1: NV_USB1.DATA
differential pair class NV_USB0: NV_USB0.DATA
differential pair class NV_DP2: NV_DP2.AUX NV_DP2.TX0 NV_DP2.TX1 NV_DP2.TX2 NV_DP2.TX3
differential pair class NV_DP1: NV_DP1.AUX NV_DP1.TX0 NV_DP1.TX1 NV_DP1.TX2 NV_DP1.TX3
differential pair class NV_DP0: NV_DP0.AUX NV_DP0.TX0 NV_DP0.TX1 NV_DP0.TX2 NV_DP0.TX3
differential pair class NV_DISPLAY: NV_DP0.AUX NV_DP0.TX0 NV_DP0.TX1 NV_DP0.TX2 NV_DP0.TX3 NV_DP1.AUX NV_DP1.TX0 NV_DP1.TX1 NV_DP1.TX2 NV_DP1.TX3 NV_DP2.AUX NV_DP2.TX0 NV_DP2.TX1 NV_DP2.TX2 NV_DP2.TX3
differential pair class NV_CSI: NV_CSI0.CLK NV_CSI0.DATA0 NV_CSI0.DATA1 NV_CSI1.CLK NV_CSI1.DATA0 NV_CSI1.DATA1 NV_CSI2.CLK NV_CSI2.DATA0 NV_CSI2.DATA1 NV_CSI3.CLK NV_CSI3.DATA0 NV_CSI3.DATA1 NV_CSI4.CLK NV_CSI4.DATA0 NV_CSI4.DATA1 NV_CSI5.CLK NV_CSI5.DATA0 NV_CSI5.DATA1 NV_CSI6.CLK NV_CSI6.DATA0 NV_CSI6.DATA1 NV_CSI7.CLK NV_CSI7.DATA0 NV_CSI7.DATA1
differential pair class NV_CSI7: NV_CSI7.CLK NV_CSI7.DATA0 NV_CSI7.DATA1
differential pair class NV_CSI6: NV_CSI6.CLK NV_CSI6.DATA0 NV_CSI6.DATA1
differential pair class NV_CSI5: NV_CSI5.CLK NV_CSI5.DATA0 NV_CSI5.DATA1
differential pair class NV_CSI4: NV_CSI4.CLK NV_CSI4.DATA0 NV_CSI4.DATA1
differential pair class NV_CSI3: NV_CSI3.CLK NV_CSI3.DATA0 NV_CSI3.DATA1
differential pair class NV_CSI2: NV_CSI2.CLK NV_CSI2.DATA0 NV_CSI2.DATA1
differential pair class NV_CSI1: NV_CSI1.CLK NV_CSI1.DATA0 NV_CSI1.DATA1
differential pair class NV_CSI0: NV_CSI0.CLK NV_CSI0.DATA0 NV_CSI0.DATA1
differential pair class NV1HS_CLK1: NV1HS_CLK1.REFCLK
differential pair class NV1HS_CLK0: NV1HS_CLK0.REFCLK
differential pair class NV1HS7: NV1HS7.RX NV1HS7.TX NV1HS7_TX
differential pair class NV1HS6: NV1HS6.RX NV1HS6.TX NV1HS6_TX
differential pair class NV1HS5: NV1HS5.RX NV1HS5.TX NV1HS5_TX
differential pair class NV1HS4: NV1HS4.RX NV1HS4.TX NV1HS4_TX
differential pair class NV1HS3: NV1HS3.RX NV1HS3.TX NV1HS3_TX
differential pair class NV1HS2: NV1HS2.RX NV1HS2.TX NV1HS2_TX
differential pair class NV1HS1: NV1HS1.RX NV1HS1.TX NV1HS1_TX
differential pair class NV1HS0: NV1HS0.RX NV1HS0.TX NV1HS0_TX
differential pair class NV0HS_CLK1: NV0HS_CLK1.REFCLK
differential pair class NV0HS_CLK0: NV0HS_CLK0.REFCLK
differential pair class NV0HS7: NV0HS7.RX NV0HS7.TX NV0HS7_TX
differential pair class NV0HS6: NV0HS6.RX NV0HS6.TX NV0HS6_TX
differential pair class NV0HS5: NV0HS5.RX NV0HS5.TX NV0HS5_TX
differential pair class NV0HS4: NV0HS4.RX NV0HS4.TX NV0HS4_TX
differential pair class NV0HS3: NV0HS3.RX NV0HS3.TX NV0HS3_TX
differential pair class NV0HS2: NV0HS2.RX NV0HS2.TX NV0HS2_TX
differential pair class NV0HS1: NV0HS1.RX NV0HS1.TX NV0HS1_TX
differential pair class NV0HS0: NV0HS0.RX NV0HS0.TX NV0HS0_TX
differential pair class DP: NV_DP0.AUX NV_DP0.TX0 NV_DP0.TX1 NV_DP0.TX2 NV_DP0.TX3 NV_DP1.AUX NV_DP1.TX0 NV_DP1.TX1 NV_DP1.TX2 NV_DP1.TX3 NV_DP2.AUX NV_DP2.TX0 NV_DP2.TX1 NV_DP2.TX2 NV_DP2.TX3
differential pair class CSI: NV_CSI0.CLK NV_CSI0.DATA0 NV_CSI0.DATA1 NV_CSI1.CLK NV_CSI1.DATA0 NV_CSI1.DATA1 NV_CSI2.CLK NV_CSI2.DATA0 NV_CSI2.DATA1 NV_CSI3.CLK NV_CSI3.DATA0 NV_CSI3.DATA1 NV_CSI4.CLK NV_CSI4.DATA0 NV_CSI4.DATA1 NV_CSI5.CLK NV_CSI5.DATA0 NV_CSI5.DATA1 NV_CSI6.CLK NV_CSI6.DATA0 NV_CSI6.DATA1 NV_CSI7.CLK NV_CSI7.DATA0 NV_CSI7.DATA1
component class System: J2 SW1 SW2 SW3
component class "RGMII ETHERNET": Q15
component class HDMI: D13 FL1 FL2 FL3 FL4 FL5 J4
differential pair USB3UP.TX: +USB3UP.TX_P -USB3UP.TX_N
differential pair USB3UP.RX: +USB3UP.RX_P -USB3UP.RX_N
differential pair USB3DN4.TX: +USB3DN4.TX_P -USB3DN4.TX_N
differential pair USB3DN4.RX: +USB3DN4.RX_P -USB3DN4.RX_N
differential pair USB3DN3.TX: +USB3DN3.TX_P -USB3DN3.TX_N
differential pair USB3DN3.RX: +USB3DN3.RX_P -USB3DN3.RX_N
differential pair USB3DN2.TX: +USB3DN2.TX_P -USB3DN2.TX_N
differential pair USB3DN2.RX: +USB3DN2.RX_P -USB3DN2.RX_N
differential pair USB3DN1.TX: +USB3DN1.TX_P -USB3DN1.TX_N
differential pair USB3DN1.RX: +USB3DN1.RX_P -USB3DN1.RX_N
differential pair USB2UP.DATA: +USB2UP.DATA_P -USB2UP.DATA_N
differential pair USB2DN4.DATA: +USB2DN4.DATA_P -USB2DN4.DATA_N
differential pair USB2DN3.DATA: +USB2DN3.DATA_P -USB2DN3.DATA_N
differential pair USB2DN2.DATA: +USB2DN2.DATA_P -USB2DN2.DATA_N
differential pair USB2DN1.DATA: +USB2DN1.DATA_P -USB2DN1.DATA_N
differential pair USB3_2.TX: +USB3_2.TX_P -USB3_2.TX_N
differential pair USB3_2.RX: +USB3_2.RX_P -USB3_2.RX_N
differential pair USB3_1.TX: +USB3_1.TX_P -USB3_1.TX_N
differential pair USB3_1.RX: +USB3_1.RX_P -USB3_1.RX_N
differential pair USB2_2.DATA: +USB2_2.DATA_P -USB2_2.DATA_N
differential pair USB2_1.DATA: +USB2_1.DATA_P -USB2_1.DATA_N
differential pair USBD: +USBD_P -USBD_N
differential pair RGMII_TRD: +RGMII_TRD_P -RGMII_TRD_N
differential pair RGMII_TRC: +RGMII_TRC_P -RGMII_TRC_N
differential pair RGMII_TRB: +RGMII_TRB_P -RGMII_TRB_N
differential pair RGMII_TRA: +RGMII_TRA_P -RGMII_TRA_N
differential pair PCIE_TRD: +PCIE_TRD_P -PCIE_TRD_N
differential pair PCIE_TRC: +PCIE_TRC_P -PCIE_TRC_N
differential pair PCIE_TRB: +PCIE_TRB_P -PCIE_TRB_N
differential pair PCIE_TRA: +PCIE_TRA_P -PCIE_TRA_N
differential pair NV_USB3.DATA: +NV_USB3.DATA_P -NV_USB3.DATA_N
differential pair NV_USB2.DATA: +NV_USB2.DATA_P -NV_USB2.DATA_N
differential pair NV_USB1.DATA: +NV_USB1.DATA_P -NV_USB1.DATA_N
differential pair NV_USB0.DATA: +NV_USB0.DATA_P -NV_USB0.DATA_N
differential pair NV_UPHY_CLK2.REFCLK: +NV_UPHY_CLK2.REFCLK_P -NV_UPHY_CLK2.REFCLK_N
differential pair NV_UPHY_CLK1.REFCLK: +NV_UPHY_CLK1.REFCLK_P -NV_UPHY_CLK1.REFCLK_N
differential pair NV_UPHY11_TX: +NV_UPHY11_TX_P -NV_UPHY11_TX_N
differential pair NV_UPHY11.TX: +NV_UPHY11.TX_P -NV_UPHY11.TX_N
differential pair NV_UPHY11.RX: +NV_UPHY11.RX_P -NV_UPHY11.RX_N
differential pair NV_UPHY10_TX: +NV_UPHY10_TX_P -NV_UPHY10_TX_N
differential pair NV_UPHY10.TX: +NV_UPHY10.TX_P -NV_UPHY10.TX_N
differential pair NV_UPHY10.RX: +NV_UPHY10.RX_P -NV_UPHY10.RX_N
differential pair NV_UPHY9_TX: +NV_UPHY9_TX_P -NV_UPHY9_TX_N
differential pair NV_UPHY9.TX: +NV_UPHY9.TX_P -NV_UPHY9.TX_N
differential pair NV_UPHY9.RX: +NV_UPHY9.RX_P -NV_UPHY9.RX_N
differential pair NV_UPHY8_TX: +NV_UPHY8_TX_P -NV_UPHY8_TX_N
differential pair NV_UPHY8.TX: +NV_UPHY8.TX_P -NV_UPHY8.TX_N
differential pair NV_UPHY8.RX: +NV_UPHY8.RX_P -NV_UPHY8.RX_N
differential pair NV_UPHY7_TX: +NV_UPHY7_TX_P -NV_UPHY7_TX_N
differential pair NV_UPHY7.TX: +NV_UPHY7.TX_P -NV_UPHY7.TX_N
differential pair NV_UPHY7.RX: +NV_UPHY7.RX_P -NV_UPHY7.RX_N
differential pair NV_UPHY6_TX: +NV_UPHY6_TX_P -NV_UPHY6_TX_N
differential pair NV_UPHY6.TX: +NV_UPHY6.TX_P -NV_UPHY6.TX_N
differential pair NV_UPHY6.RX: +NV_UPHY6.RX_P -NV_UPHY6.RX_N
differential pair NV_UPHY5_TX: +NV_UPHY5_TX_P -NV_UPHY5_TX_N
differential pair NV_UPHY5.TX: +NV_UPHY5.TX_P -NV_UPHY5.TX_N
differential pair NV_UPHY5.RX: +NV_UPHY5.RX_P -NV_UPHY5.RX_N
differential pair NV_UPHY4_TX: +NV_UPHY4_TX_P -NV_UPHY4_TX_N
differential pair NV_UPHY4.TX: +NV_UPHY4.TX_P -NV_UPHY4.TX_N
differential pair NV_UPHY4.RX: +NV_UPHY4.RX_P -NV_UPHY4.RX_N
differential pair NV_UPHY3_TX: +NV_UPHY3_TX_P -NV_UPHY3_TX_N
differential pair NV_UPHY3.TX: +NV_UPHY3.TX_P -NV_UPHY3.TX_N
differential pair NV_UPHY3.RX: +NV_UPHY3.RX_P -NV_UPHY3.RX_N
differential pair NV_UPHY2_TX: +NV_UPHY2_TX_P -NV_UPHY2_TX_N
differential pair NV_UPHY2.TX: +NV_UPHY2.TX_P -NV_UPHY2.TX_N
differential pair NV_UPHY2.RX: +NV_UPHY2.RX_P -NV_UPHY2.RX_N
differential pair NV_UPHY1_TX: +NV_UPHY1_TX_P -NV_UPHY1_TX_N
differential pair NV_UPHY1.TX: +NV_UPHY1.TX_P -NV_UPHY1.TX_N
differential pair NV_UPHY1.RX: +NV_UPHY1.RX_P -NV_UPHY1.RX_N
differential pair NV_UPHY0_TX: +NV_UPHY0_TX_P -NV_UPHY0_TX_N
differential pair NV_UPHY0.TX: +NV_UPHY0.TX_P -NV_UPHY0.TX_N
differential pair NV_UPHY0.RX: +NV_UPHY0.RX_P -NV_UPHY0.RX_N
differential pair NV_PCIE_CTRL5.CLK: +NV_PCIE_CTRL5.CLK_P -NV_PCIE_CTRL5.CLK_N
differential pair NV_PCIE_CTRL4.CLK: +NV_PCIE_CTRL4.CLK_P -NV_PCIE_CTRL4.CLK_N
differential pair NV_PCIE_CTRL3.CLK: +NV_PCIE_CTRL3.CLK_P -NV_PCIE_CTRL3.CLK_N
differential pair NV_PCIE_CTRL2.CLK: +NV_PCIE_CTRL2.CLK_P -NV_PCIE_CTRL2.CLK_N
differential pair NV_PCIE_CTRL1.CLK: +NV_PCIE_CTRL1.CLK_P -NV_PCIE_CTRL1.CLK_N
differential pair NV_PCIE_CTRL0.CLK: +NV_PCIE_CTRL0.CLK_P -NV_PCIE_CTRL0.CLK_N
differential pair NV_HDMI_TMDSCLK: +NV_HDMI_TMDSCLK_P -NV_HDMI_TMDSCLK_N
differential pair NV_HDMI_TMDS2: +NV_HDMI_TMDS2_P -NV_HDMI_TMDS2_N
differential pair NV_HDMI_TMDS1: +NV_HDMI_TMDS1_P -NV_HDMI_TMDS1_N
differential pair NV_HDMI_TMDS0: +NV_HDMI_TMDS0_P -NV_HDMI_TMDS0_N
differential pair NV_DP2.TX3: +NV_DP2.TX3_P -NV_DP2.TX3_N
differential pair NV_DP2.TX2: +NV_DP2.TX2_P -NV_DP2.TX2_N
differential pair NV_DP2.TX1: +NV_DP2.TX1_P -NV_DP2.TX1_N
differential pair NV_DP2.TX0: +NV_DP2.TX0_P -NV_DP2.TX0_N
differential pair NV_DP2.AUX: +NV_DP2.AUX_P -NV_DP2.AUX_N
differential pair NV_DP1.TX3: +NV_DP1.TX3_P -NV_DP1.TX3_N
differential pair NV_DP1.TX2: +NV_DP1.TX2_P -NV_DP1.TX2_N
differential pair NV_DP1.TX1: +NV_DP1.TX1_P -NV_DP1.TX1_N
differential pair NV_DP1.TX0: +NV_DP1.TX0_P -NV_DP1.TX0_N
differential pair NV_DP1.AUX: +NV_DP1.AUX_P -NV_DP1.AUX_N
differential pair NV_DP0.TX3: +NV_DP0.TX3_P -NV_DP0.TX3_N
differential pair NV_DP0.TX2: +NV_DP0.TX2_P -NV_DP0.TX2_N
differential pair NV_DP0.TX1: +NV_DP0.TX1_P -NV_DP0.TX1_N
differential pair NV_DP0.TX0: +NV_DP0.TX0_P -NV_DP0.TX0_N
differential pair NV_DP0.AUX: +NV_DP0.AUX_P -NV_DP0.AUX_N
differential pair NV_CSI7.DATA1: +NV_CSI7.DATA1_P -NV_CSI7.DATA1_N
differential pair NV_CSI7.DATA0: +NV_CSI7.DATA0_P -NV_CSI7.DATA0_N
differential pair NV_CSI7.CLK: +NV_CSI7.CLK_P -NV_CSI7.CLK_N
differential pair NV_CSI6.DATA1: +NV_CSI6.DATA1_P -NV_CSI6.DATA1_N
differential pair NV_CSI6.DATA0: +NV_CSI6.DATA0_P -NV_CSI6.DATA0_N
differential pair NV_CSI6.CLK: +NV_CSI6.CLK_P -NV_CSI6.CLK_N
differential pair NV_CSI5.DATA1: +NV_CSI5.DATA1_P -NV_CSI5.DATA1_N
differential pair NV_CSI5.DATA0: +NV_CSI5.DATA0_P -NV_CSI5.DATA0_N
differential pair NV_CSI5.CLK: +NV_CSI5.CLK_P -NV_CSI5.CLK_N
differential pair NV_CSI4.DATA1: +NV_CSI4.DATA1_P -NV_CSI4.DATA1_N
differential pair NV_CSI4.DATA0: +NV_CSI4.DATA0_P -NV_CSI4.DATA0_N
differential pair NV_CSI4.CLK: +NV_CSI4.CLK_P -NV_CSI4.CLK_N
differential pair NV_CSI3.DATA1: +NV_CSI3.DATA1_P -NV_CSI3.DATA1_N
differential pair NV_CSI3.DATA0: +NV_CSI3.DATA0_P -NV_CSI3.DATA0_N
differential pair NV_CSI3.CLK: +NV_CSI3.CLK_P -NV_CSI3.CLK_N
differential pair NV_CSI2.DATA1: +NV_CSI2.DATA1_P -NV_CSI2.DATA1_N
differential pair NV_CSI2.DATA0: +NV_CSI2.DATA0_P -NV_CSI2.DATA0_N
differential pair NV_CSI2.CLK: +NV_CSI2.CLK_P -NV_CSI2.CLK_N
differential pair NV_CSI1.DATA1: +NV_CSI1.DATA1_P -NV_CSI1.DATA1_N
differential pair NV_CSI1.DATA0: +NV_CSI1.DATA0_P -NV_CSI1.DATA0_N
differential pair NV_CSI1.CLK: +NV_CSI1.CLK_P -NV_CSI1.CLK_N
differential pair NV_CSI0.DATA1: +NV_CSI0.DATA1_P -NV_CSI0.DATA1_N
differential pair NV_CSI0.DATA0: +NV_CSI0.DATA0_P -NV_CSI0.DATA0_N
differential pair NV_CSI0.CLK: +NV_CSI0.CLK_P -NV_CSI0.CLK_N
differential pair NV1HS_CLK1.REFCLK: +NV1HS_CLK1.REFCLK_P -NV1HS_CLK1.REFCLK_N
differential pair NV1HS_CLK0.REFCLK: +NV1HS_CLK0.REFCLK_P -NV1HS_CLK0.REFCLK_N
differential pair NV1HS7_TX: +NV1HS7_TX_P -NV1HS7_TX_N
differential pair NV1HS7.TX: +NV1HS7.TX_P -NV1HS7.TX_N
differential pair NV1HS7.RX: +NV1HS7.RX_P -NV1HS7.RX_N
differential pair NV1HS6_TX: +NV1HS6_TX_P -NV1HS6_TX_N
differential pair NV1HS6.TX: +NV1HS6.TX_P -NV1HS6.TX_N
differential pair NV1HS6.RX: +NV1HS6.RX_P -NV1HS6.RX_N
differential pair NV1HS5_TX: +NV1HS5_TX_P -NV1HS5_TX_N
differential pair NV1HS5.TX: +NV1HS5.TX_P -NV1HS5.TX_N
differential pair NV1HS5.RX: +NV1HS5.RX_P -NV1HS5.RX_N
differential pair NV1HS4_TX: +NV1HS4_TX_P -NV1HS4_TX_N
differential pair NV1HS4.TX: +NV1HS4.TX_P -NV1HS4.TX_N
differential pair NV1HS4.RX: +NV1HS4.RX_P -NV1HS4.RX_N
differential pair NV1HS3_TX: +NV1HS3_TX_P -NV1HS3_TX_N
differential pair NV1HS3.TX: +NV1HS3.TX_P -NV1HS3.TX_N
differential pair NV1HS3.RX: +NV1HS3.RX_P -NV1HS3.RX_N
differential pair NV1HS2_TX: +NV1HS2_TX_P -NV1HS2_TX_N
differential pair NV1HS2.TX: +NV1HS2.TX_P -NV1HS2.TX_N
differential pair NV1HS2.RX: +NV1HS2.RX_P -NV1HS2.RX_N
differential pair NV1HS1_TX: +NV1HS1_TX_P -NV1HS1_TX_N
differential pair NV1HS1.TX: +NV1HS1.TX_P -NV1HS1.TX_N
differential pair NV1HS1.RX: +NV1HS1.RX_P -NV1HS1.RX_N
differential pair NV1HS0_TX: +NV1HS0_TX_P -NV1HS0_TX_N
differential pair NV1HS0.TX: +NV1HS0.TX_P -NV1HS0.TX_N
differential pair NV1HS0.RX: +NV1HS0.RX_P -NV1HS0.RX_N
differential pair NV0HS_CLK1.REFCLK: +NV0HS_CLK1.REFCLK_P -NV0HS_CLK1.REFCLK_N
differential pair NV0HS_CLK0.REFCLK: +NV0HS_CLK0.REFCLK_P -NV0HS_CLK0.REFCLK_N
differential pair NV0HS7_TX: +NV0HS7_TX_P -NV0HS7_TX_N
differential pair NV0HS7.TX: +NV0HS7.TX_P -NV0HS7.TX_N
differential pair NV0HS7.RX: +NV0HS7.RX_P -NV0HS7.RX_N
differential pair NV0HS6_TX: +NV0HS6_TX_P -NV0HS6_TX_N
differential pair NV0HS6.TX: +NV0HS6.TX_P -NV0HS6.TX_N
differential pair NV0HS6.RX: +NV0HS6.RX_P -NV0HS6.RX_N
differential pair NV0HS5_TX: +NV0HS5_TX_P -NV0HS5_TX_N
differential pair NV0HS5.TX: +NV0HS5.TX_P -NV0HS5.TX_N
differential pair NV0HS5.RX: +NV0HS5.RX_P -NV0HS5.RX_N
differential pair NV0HS4_TX: +NV0HS4_TX_P -NV0HS4_TX_N
differential pair NV0HS4.TX: +NV0HS4.TX_P -NV0HS4.TX_N
differential pair NV0HS4.RX: +NV0HS4.RX_P -NV0HS4.RX_N
differential pair NV0HS3_TX: +NV0HS3_TX_P -NV0HS3_TX_N
differential pair NV0HS3.TX: +NV0HS3.TX_P -NV0HS3.TX_N
differential pair NV0HS3.RX: +NV0HS3.RX_P -NV0HS3.RX_N
differential pair NV0HS2_TX: +NV0HS2_TX_P -NV0HS2_TX_N
differential pair NV0HS2.TX: +NV0HS2.TX_P -NV0HS2.TX_N
differential pair NV0HS2.RX: +NV0HS2.RX_P -NV0HS2.RX_N
differential pair NV0HS1_TX: +NV0HS1_TX_P -NV0HS1_TX_N
differential pair NV0HS1.TX: +NV0HS1.TX_P -NV0HS1.TX_N
differential pair NV0HS1.RX: +NV0HS1.RX_P -NV0HS1.RX_N
differential pair NV0HS0_TX: +NV0HS0_TX_P -NV0HS0_TX_N
differential pair NV0HS0.TX: +NV0HS0.TX_P -NV0HS0.TX_N
differential pair NV0HS0.RX: +NV0HS0.RX_P -NV0HS0.RX_N
differential pair CANB: +CANB_P -CANB_N
differential pair CANA: +CANA_P -CANA_N

## Components (designator, comment, footprint, x,y, rotation, side; value= is the part's Value field where it differs from the comment)
C31 "CAP_0.22uF_25V_X5R_0402" CAP0402 2255,1690 r270 top
C32 "CAP_10uF_50V_1210" CAP1210 2040,2325 r0 top value=10μF
C33 "CAP_10uF_50V_1210" CAP1210 2041.02,2195 r0 top value=10μF
C34 "CAP_10uF_50V_1210" CAP1210 2041.02,2065 r0 top value=10μF
C35 "CAP_10uF_50V_1210" CAP1210 2041.02,1935 r0 top value=10μF
C37 "CAP_10uF_16V_0805" CAP2012 2875,1967.44 r180 top value=10μF
C38 "CAP_10uF_16V_0805" CAP2012 2875,2052.44 r180 top value=10μF
C39 "CAP_10uF_16V_0805" CAP2012 2875,2137.44 r180 top value=10μF
C40 "CAP_10uF_16V_0805" CAP2012 2875,2222.44 r180 top value=10μF
C41 "CAP_0.22uF_25V_X5R_0402" CAP0402 2640.63,1905 r0 top
C42 "CAP_1uF_25V_0402" CAP0402 2010,1830 r0 top
C43 "CAP_180pF_50V_0402" CAP0402 2630,1620.32 r270 bottom
C45 "CAP_10uF_16V_0805" CAP2012 2180,1549.76 r90 top value=10μF
C46 "CAP_10uF_16V_0805" CAP2012 2255,1549.76 r90 top value=10μF
C54 "CAP_100pF_50V_0402" CAP0402 2475,1820 r180 bottom
C56 "CAP_0.027uF_10V_X7R_0402" CAP0402 2555,1722 r270 bottom
C57 "CAP_1.2nF_50V_X7R_0402" CAP0402 2590,1615 r90 bottom
C59 "CAP_120pF_50V_0402" CAP0402 2555,1650 r90 bottom
C60 "CAP_1.2nF_50V_X7R_0402" CAP0402 2715,1795 r270 top
D5 "SBR0230T5-7" SOD523 2205,1700 r270 top value=30V
D6 "DIO_LED_G" LED_0805_GREEN 2866.57,1882.44 r0 top
L3 "IND_2.2uH_14.5A" IND_VISHAY_IHLP3232DZER2R2M11 2617.5,2105 r180 top
Q5 "NMOS_30V_60A" MOSFET_CSD19531Q5A 2299.02,2254.3 r90 top
Q6 "NMOS_30V_60A" MOSFET_CSD19531Q5A 2299.02,1965.7 r90 top
Q7 "MMBT4401-7-F" MMBT4401-7-F 2635,1815 r180 top
R19 "RES_2.21Ω_0402_1%" RES0402 2094.68,1830 r0 top value=2.21Ω
R20 "RES_1kΩ_0402" RES0402 2755.55,1882.44 r180 top
R21 "RES_845Ω_0402_1%" RES0402 2555.32,1905 r0 top value=845Ω
R23 "RES_20kΩ_0402_1%" RES0402 2670,1650 r270 bottom value=20kΩ
R24 "RES_56.2kΩ_0402_1%" RES0402 2340,1520 r0 bottom value=56.2kΩ
R25 "RES_7.87kΩ_0402_1%" RES0402 2435,1785 r180 bottom value=7.87kΩ
R26 "RES_124Ω_0402_1%" RES0402 2630,1684.68 r270 bottom value=124Ω
R28 "RES_7.87kΩ_0402_1%" RES0402 2510,1785 r0 bottom value=7.87kΩ
R29 "RES_11kΩ_0402_1%" RES0402 2555,1565 r90 bottom value=11kΩ
R30 "RES_3.48kΩ_0402_1%" RES0402 2590,1679.68 r90 bottom value=3.48kΩ
R31 "RES_86.6kΩ_0402_1%" RES0402 2490,1505 r90 bottom value=86.6kΩ
R32 "RES_4.42kΩ_0402_1%" RES0402 2670,1714.68 r270 bottom value=4.42kΩ
U4 "LM27403SQE/NOPB" QFN50P400X400X80-25N 2433.62,1644.21 r180 bottom

## Footprints (in the part's own frame and the unit in brackets; to place one, negate y for a bottom-side part, rotate by r counter-clockwise, add the part's x,y. Pads: shape width x height; smd on the part's side, far side on the other; paste and mask are expansions set on the pad)
CAP0402 [mm] "Chip Capacitor, Body 1x0.5mm, Height 0.35mm, IPC Medium Density"
  rrect15% 0.6x0.7 smd: 1(-0.5,0) 2(0.5,0)
  body extent -0.52,-0.28 0.52,0.28, height 0.54
CAP1210 [mm]
  rrect15% 1.6x3.15 smd: 1(-1.625,0) 2(1.625,0)
  silkscreen extent -0.6,-1.35 0.6,1.35, body extent -1.7,-1.35 1.7,1.35, height 2.1
CAP2012 [mm]
  rrect20% 1.25x1.6 smd: 1(-0.895,0) 2(0.895,0)
  body extent -1.1,-0.7 1.1,0.75, height 1.41
IND_VISHAY_IHLP3232DZER2R2M11 [mil]
  rrect15% 95x210 smd: 1(-142.5,0) 2(142.5,0)
  body extent -169,-153 169,169, height 152
LED_0805_GREEN [mm] "SMD, 2-Leads, Body 2x1.25mm"
  rrect20% 1.3x1.3 smd: 1(-1.05,0) 2(1.05,0)
  silkscreen extent -0.18,-0.64 2.11,0.64, body extent -1,-0.62 1,0.63, height 1.12
MMBT4401-7-F [mm]
  rect 0.9x0.8 smd: 1(-1,0.95) 2(-1,-0.95) 3(1,0)
  silkscreen extent -0.67,-1.17 0.67,1.17, body extent -1.2,-1.45 1.2,1.45, height 1.1
MOSFET_CSD19531Q5A [mm]
  rect 0.75x0.675 smd paste-1: 1(-2.776,-0.66) 1(-2.776,0.66) 1(-2.776,1.917) 2(-2.776,-1.917)
  rect 4.295x4.51 smd paste-3: 3(0.301,0)
  rect 0.655x0.675 smd paste-1: 3(2.776,-1.917) 3(2.776,-0.66) 3(2.776,0.66) 3(2.776,1.917)
  silkscreen extent -3.63,-2.5 2.9,2.5, body extent -3,-2.45 3,2.45, height 1.1
QFN50P400X400X80-25N [mm]
  rrect25% 0.89x0.26 smd: 1(-1.94,1.25) 2(-1.94,0.75) 3(-1.94,0.25) 4(-1.94,-0.25) 5(-1.94,-0.75) 6(-1.94,-1.25) 13(1.94,-1.25) 14(1.94,-0.75) 15(1.94,-0.25) 16(1.94,0.25) 17(1.94,0.75) 18(1.94,1.25)
  rrect25% 0.26x0.89 smd: 7(-1.25,-1.94) 8(-0.75,-1.94) 9(-0.25,-1.94) 10(0.25,-1.94) 11(0.75,-1.94) 12(1.25,-1.94) 19(1.25,1.94) 20(0.75,1.94) 21(0.25,1.94) 22(-0.25,1.94) 23(-0.75,1.94) 24(-1.25,1.94)
  rect 2.45x2.45 smd paste-0.455: 25(0,0)
  silkscreen extent -3.13,-2.07 2.07,2.07, body extent -2,-2 2,2, height 0.8
RES0402 [mm] "Chip Resistor, Body 1x0.5mm, IPC Medium Density"
  rrect15% 0.6x0.7 smd: 1(-0.5,0) 2(0.5,0)
  body extent -0.5,-0.25 0.5,0.25, height 0.27
SOD523 [mm] "ESD5Z3.3T1G"
  rrect15% 0.7x0.6 smd: 1(-0.76,0) 2(0.76,0)
  silkscreen extent -0.18,-0.3 1.35,0.31, body extent -0.8,-0.4 0.8,0.4, height 0.7